# Altium PCB Wenzel_REF.PCBDOC (part 1 of 7)
Units mm, origin at the board's own origin, x right, y up, seen from the top; angles counter-clockwise.
Board outline 222.63 x 100.1 mm, 4 copper layers (Top, L2, L3, Bot), stack 1.6 mm thick; 406 components, 236 nets, 1324 pads, 1362 vias.
Unrouted connection lines stored in the file: 1.
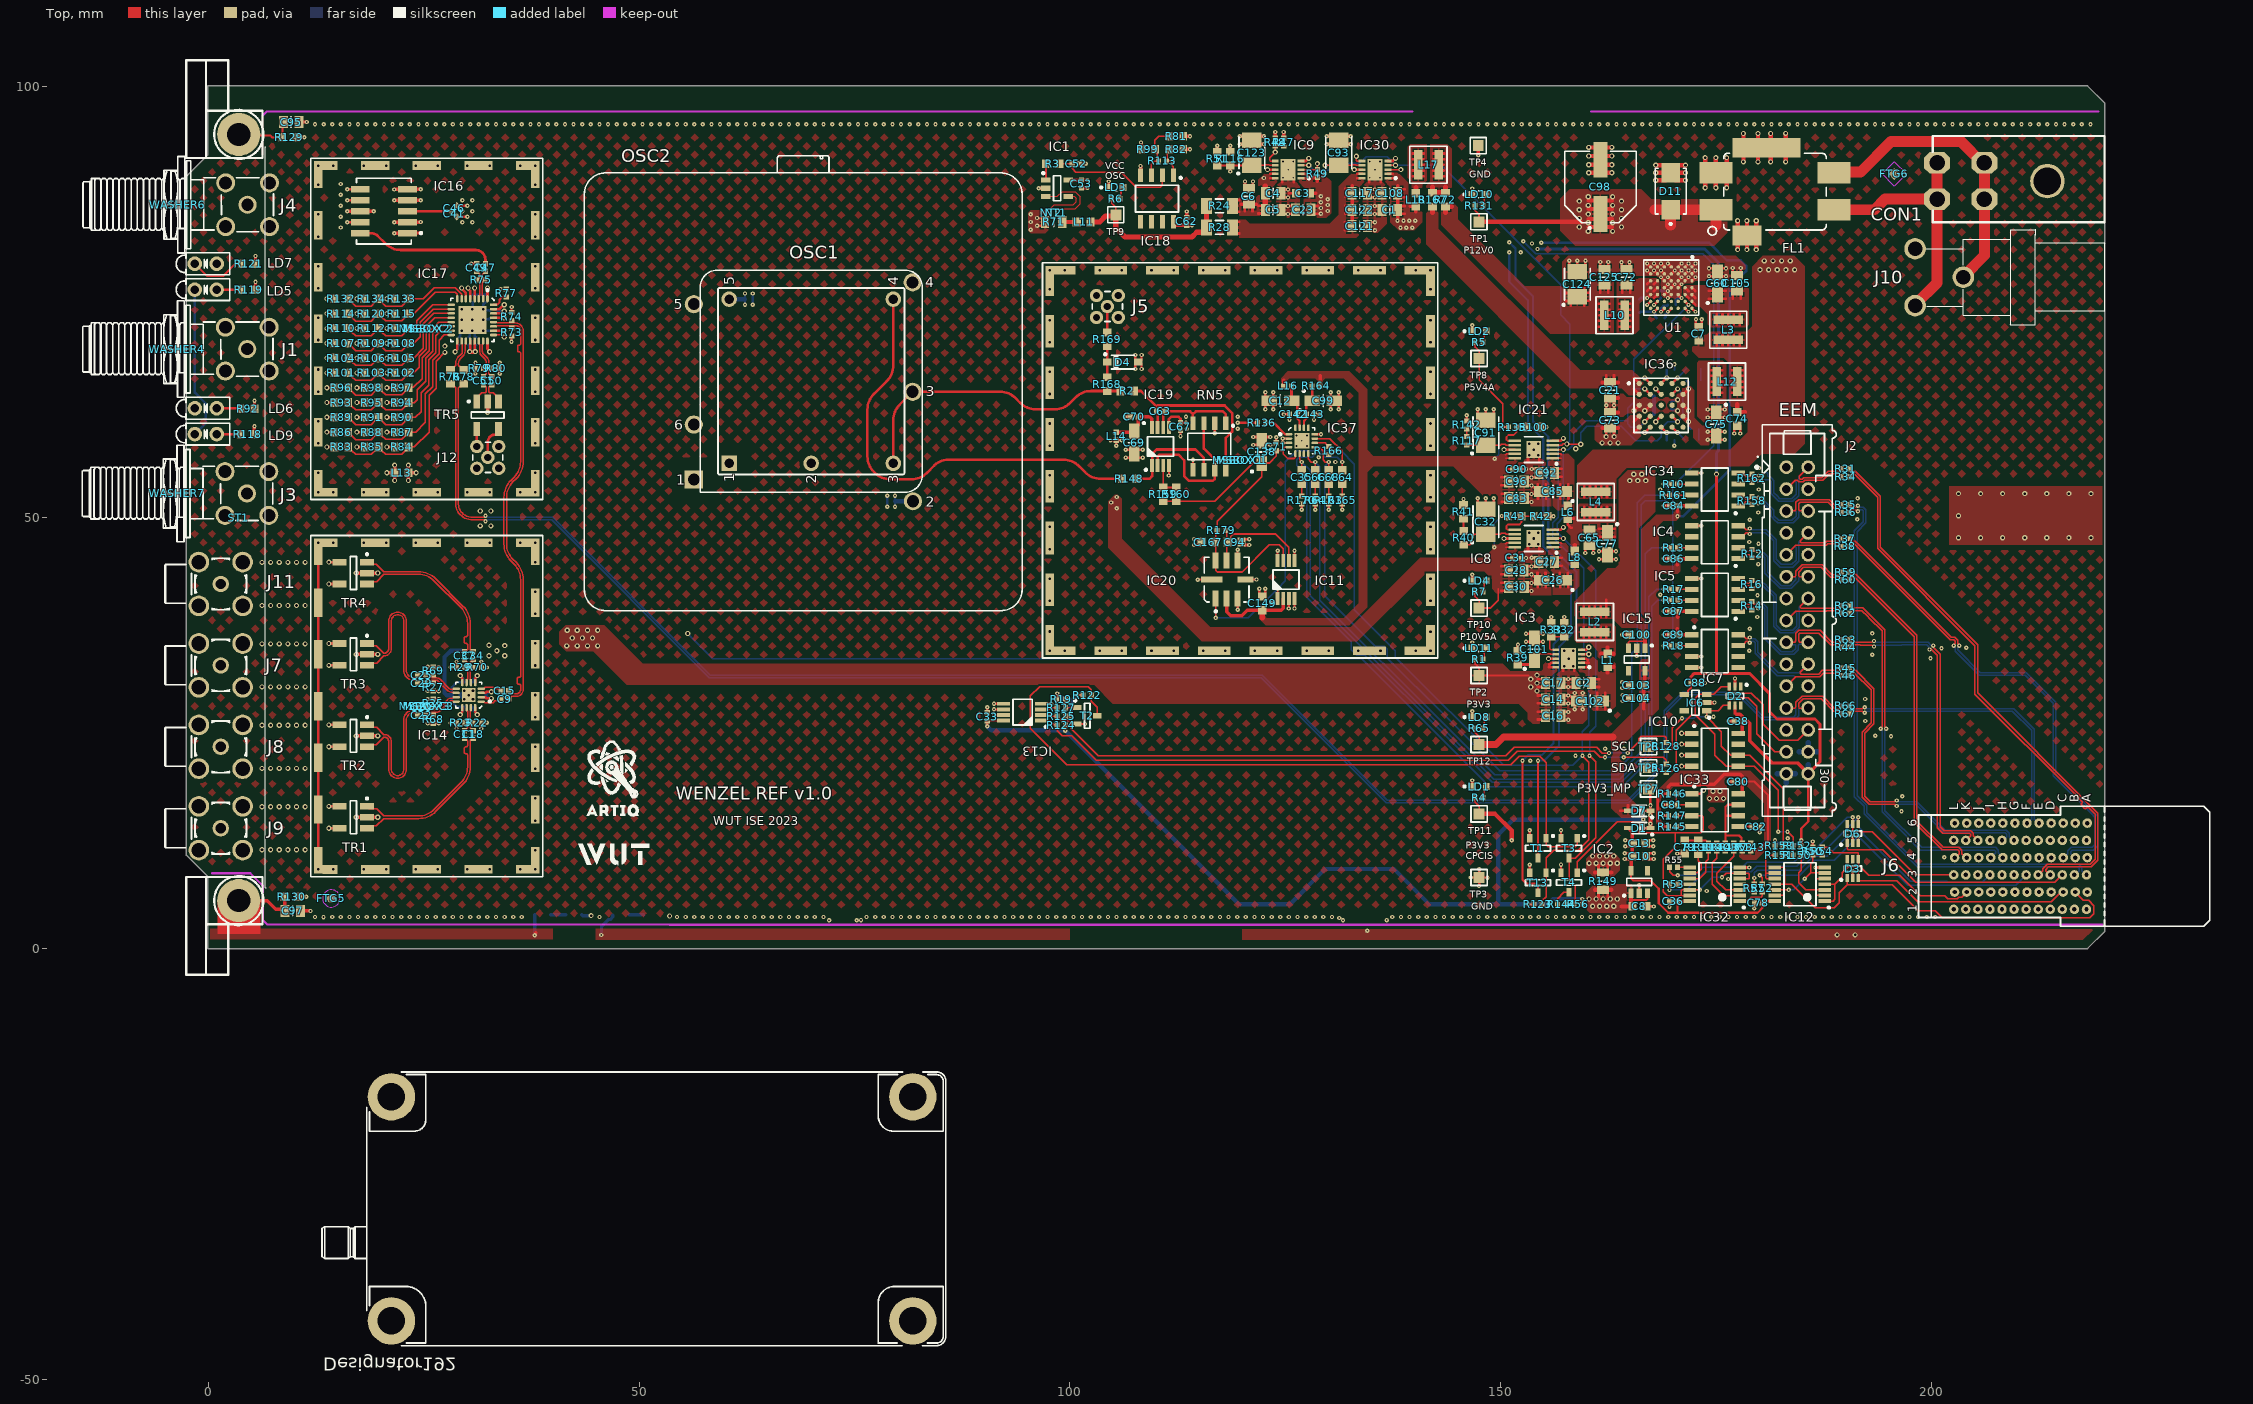
[diagram p0: Top view]
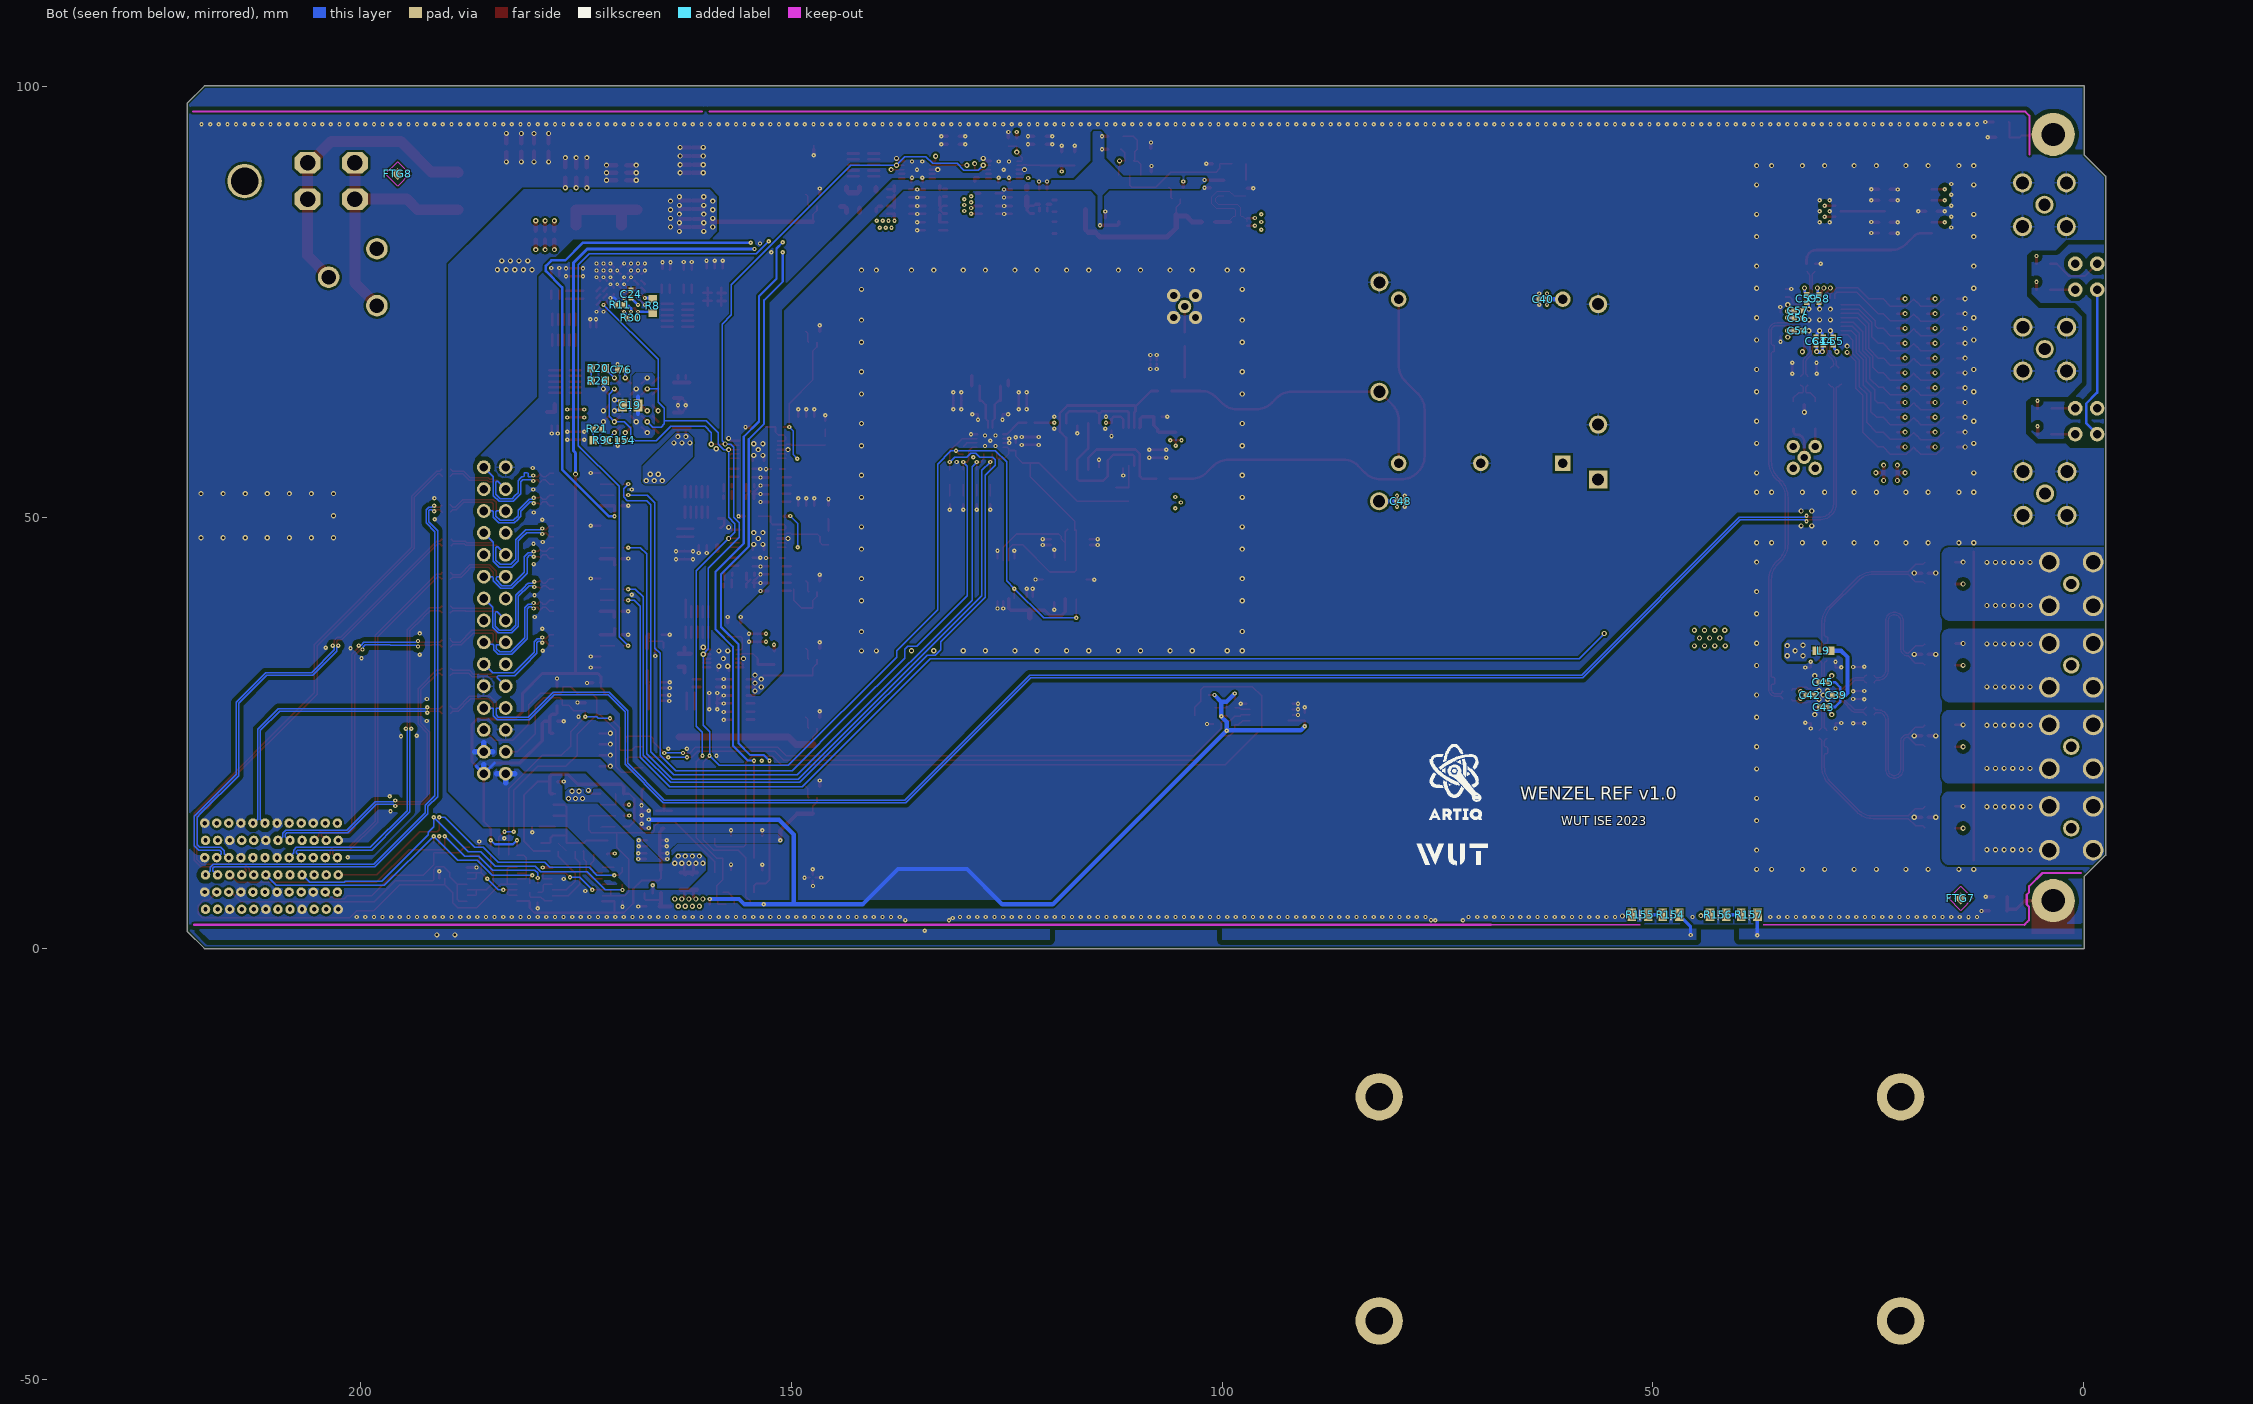
[diagram p1: Bot view, seen from below]
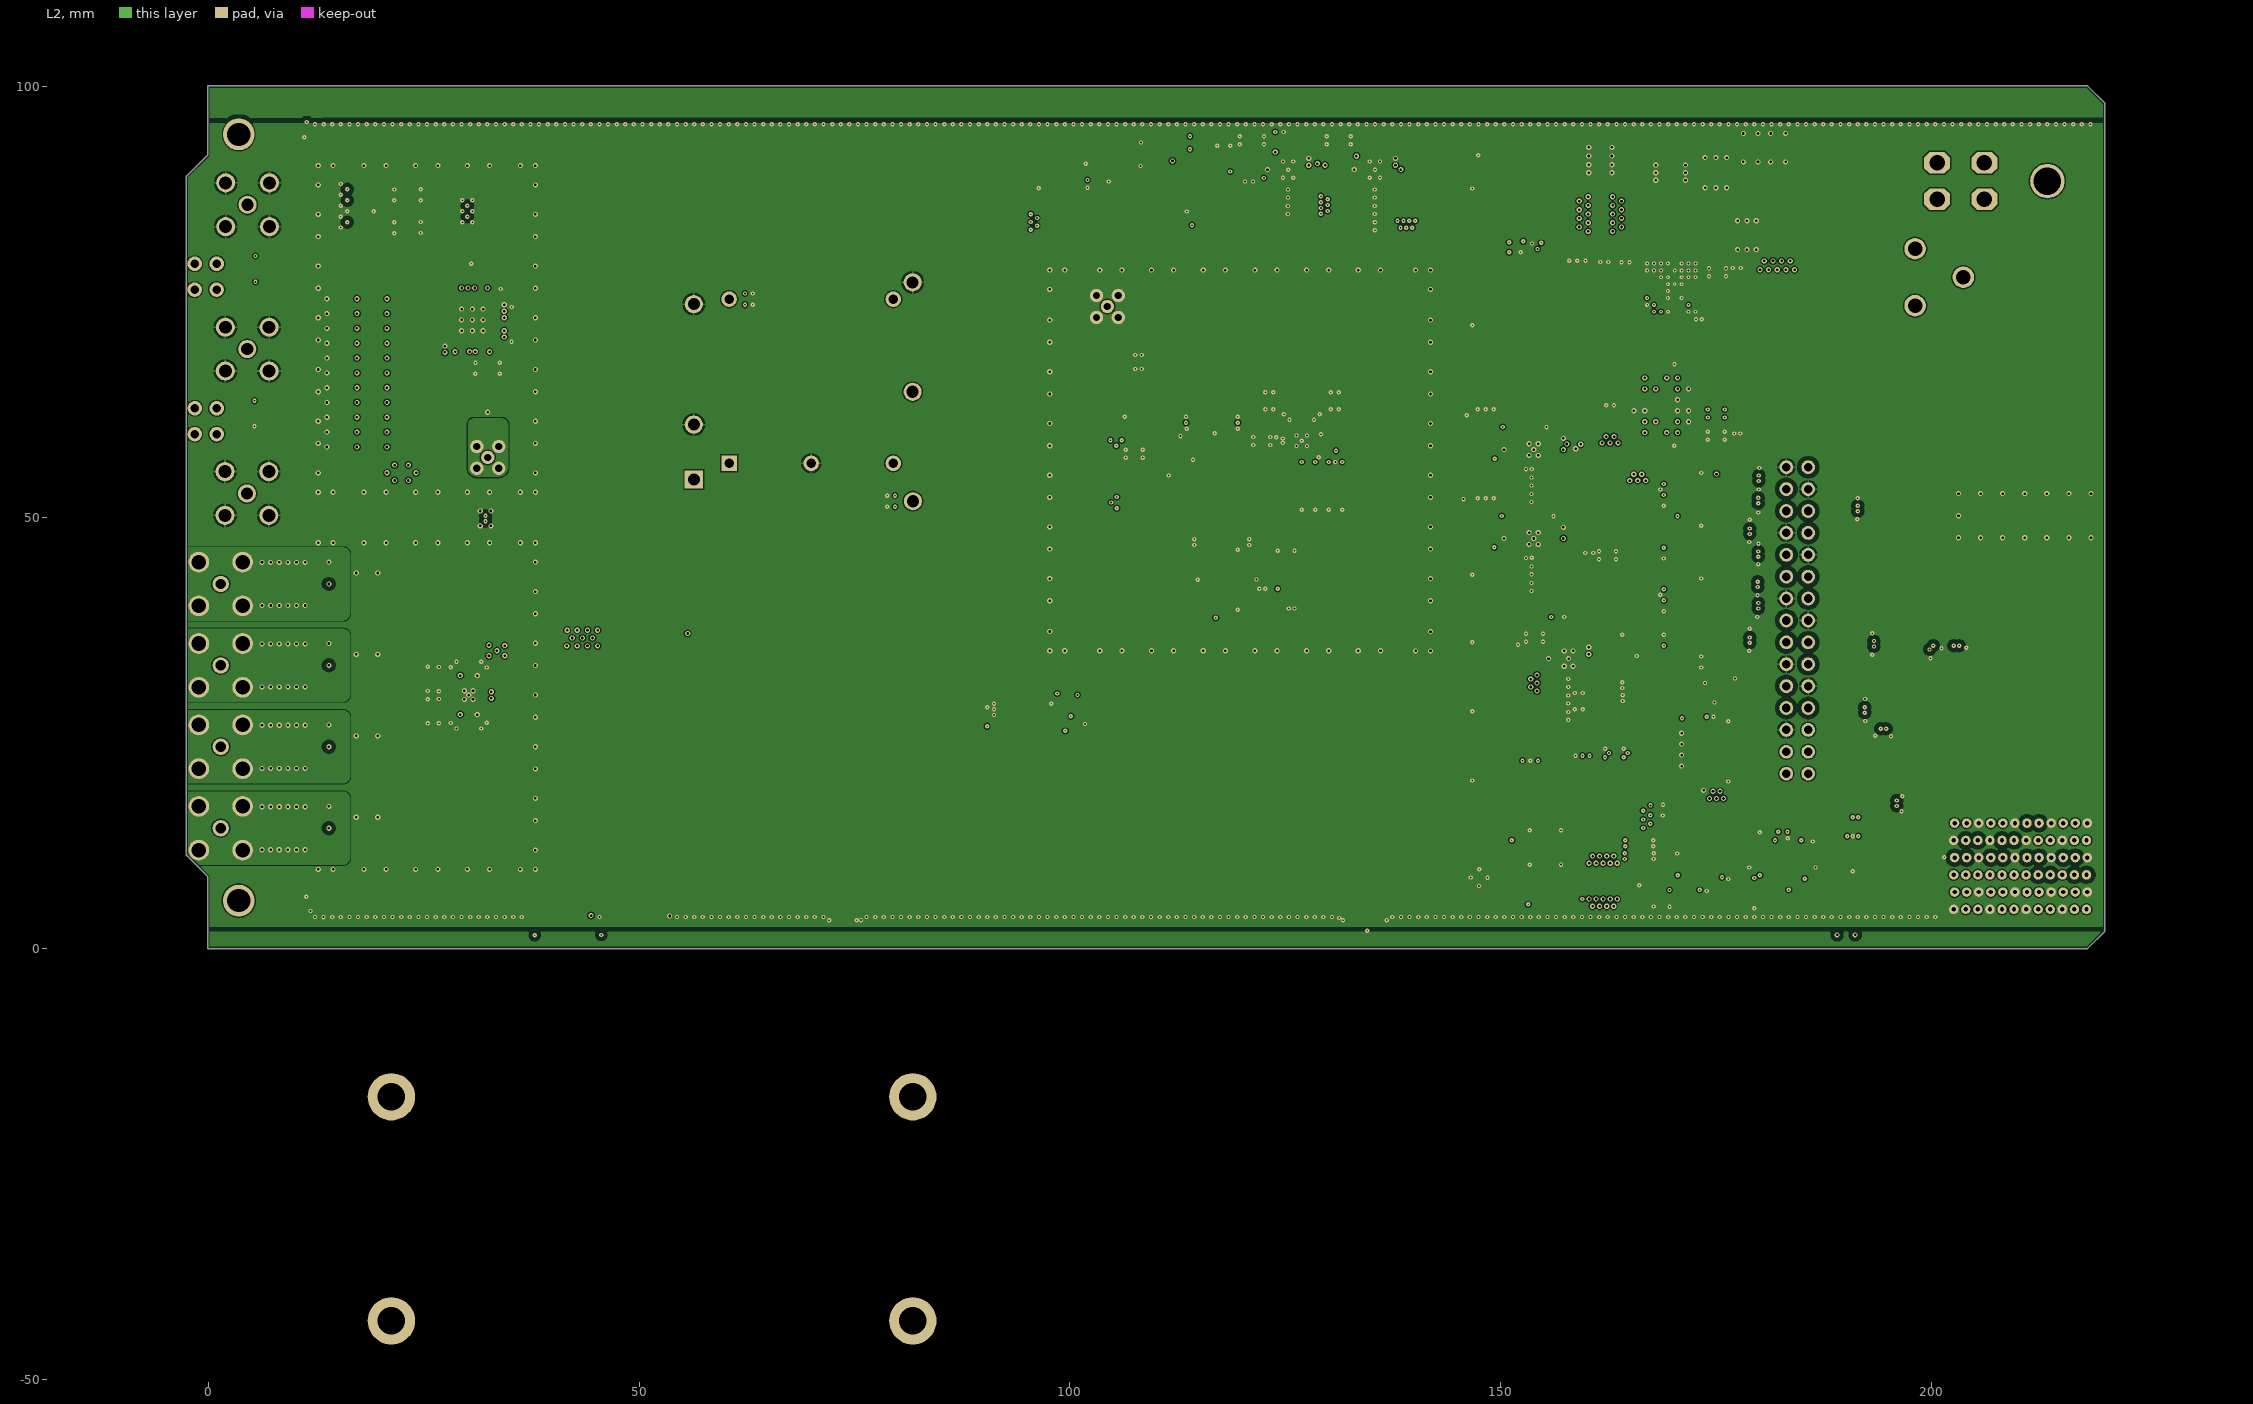
[diagram p2: L2]
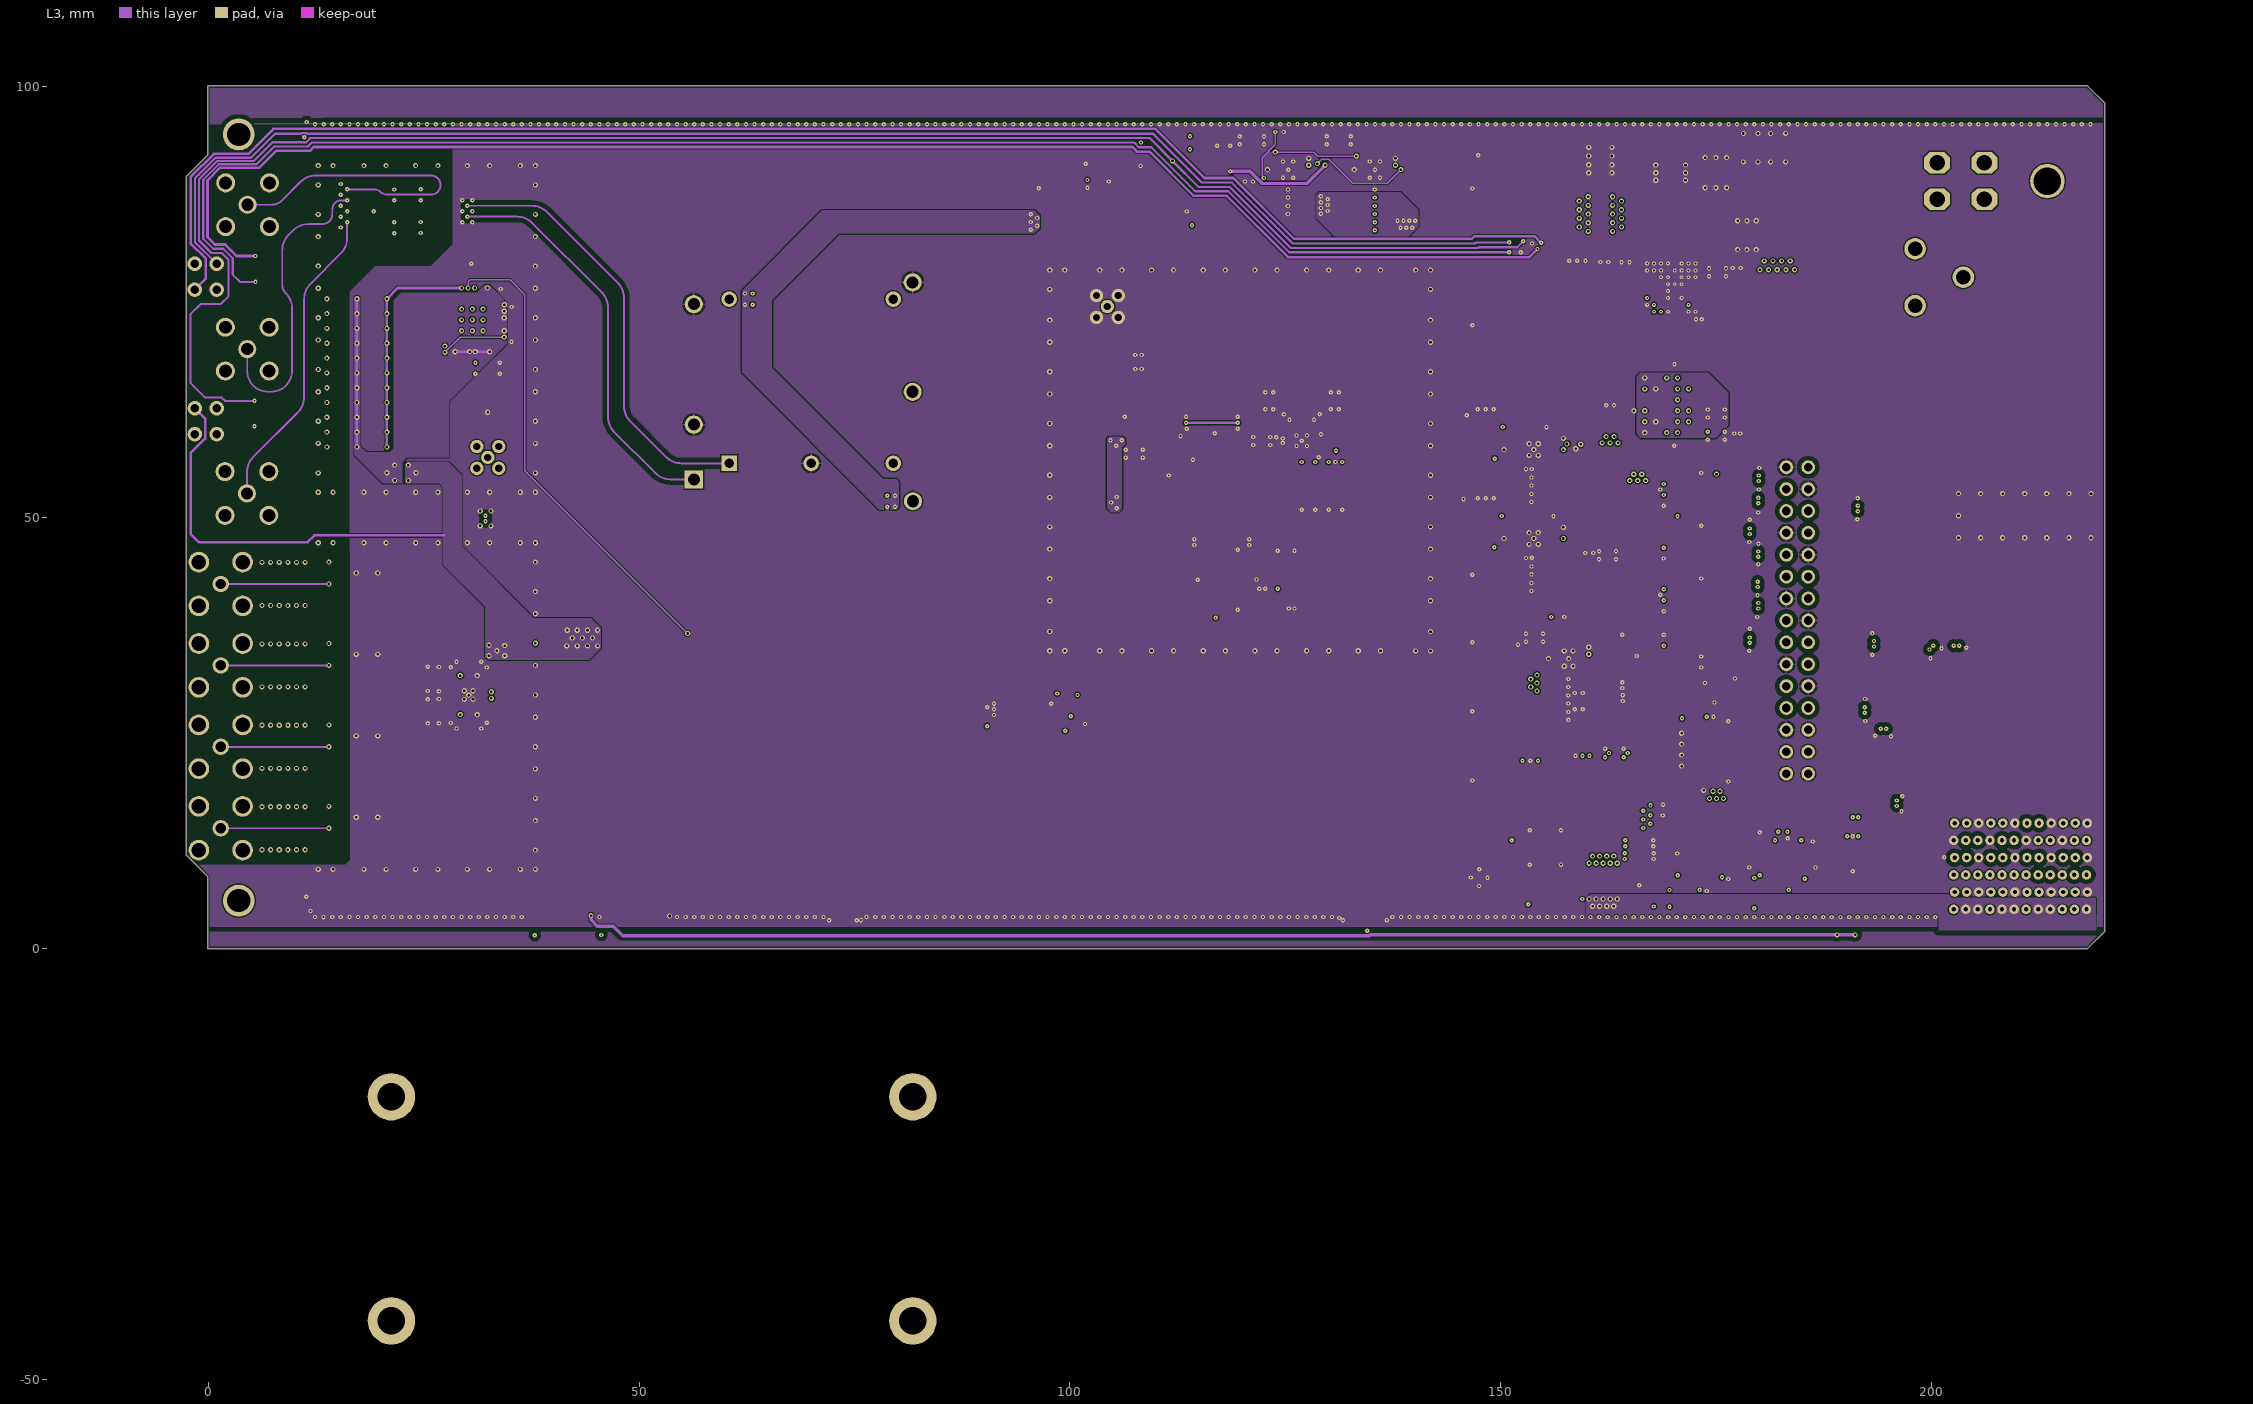
[diagram p3: L3]
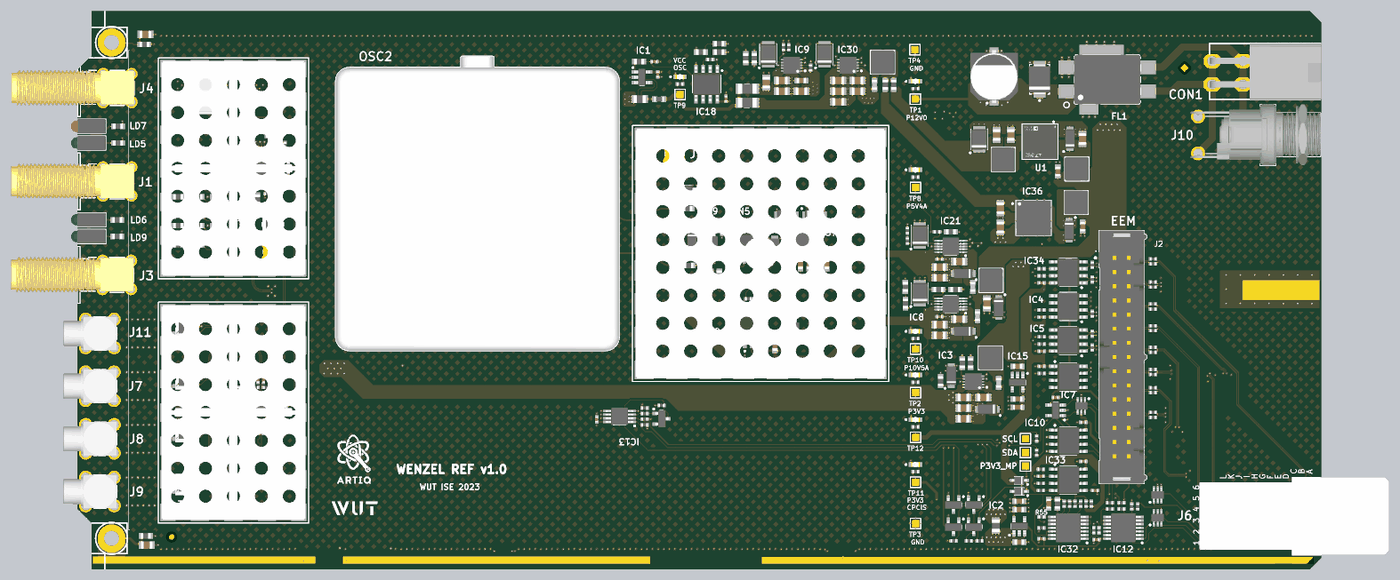
[diagram p8: 3D render of the assembled board from above, using the file's embedded part models]
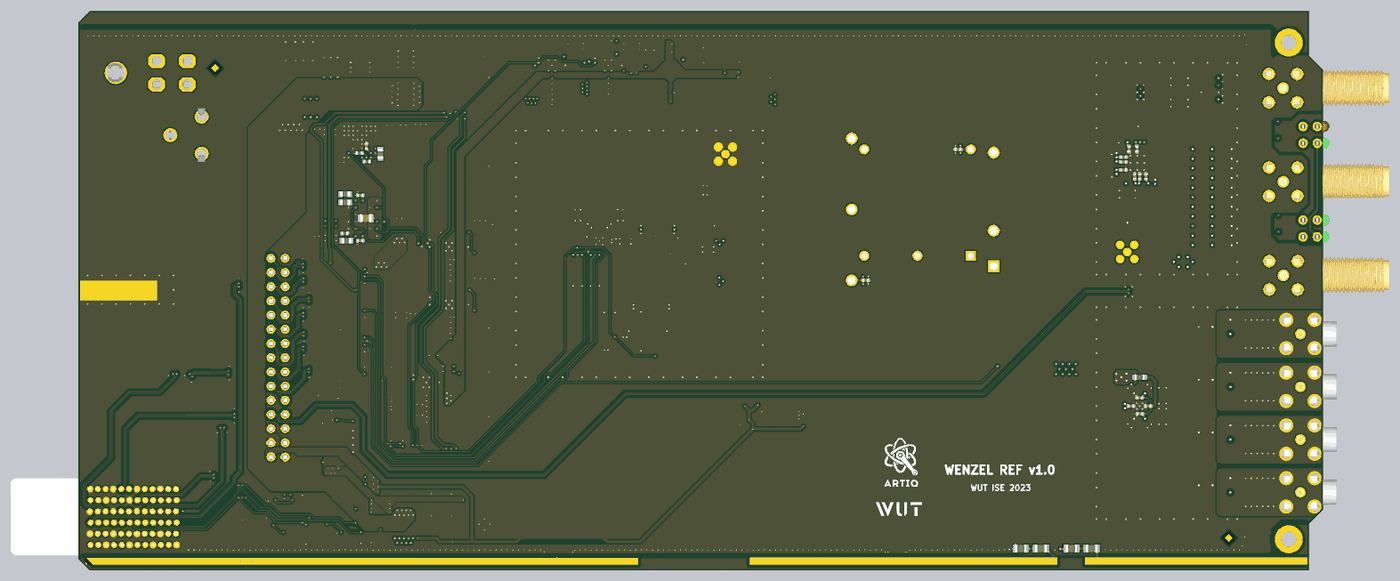
[diagram p9: 3D render of the assembled board from below, using the file's embedded part models]

## Layer stack, top to bottom
TopSolder: solder mask 0.0102, Solder Resist, Dk 3.5
Top: signal copper 0.035
Dielectric1: core 0.18, FR-4, Dk 4.2
L2: signal copper 0.035
Dielectric 3: prepreg 1.1, FR-4, Dk 4.2
L3: signal copper 0.035
Dielectric2: core 0.18, FR-4, Dk 4.2
Bot: signal copper 0.035
BottomSolder: solder mask 0.0102, Solder Resist, Dk 3.5

## Board outline
-2.54,10.82 -2.54,15.138 cw(c-2.489,15.138) -2.539,15.142 cw(c-2.489,15.145) -2.54,15.145 -2.54,22.645 -2.54,89.511 cw(c-2.489,89.511) -2.525,89.547 -0.05,92.021 -0.05,100 cw(c0,100) 0,100.05 159.99,100.05 cw(c159.995,100) 159.995,100.05 218.037,100.05 cw(c218.039,100) 218.075,100.036 220.074,98.036 cw(c220.039,98) 220.089,98 220.089,2 cw(c220.039,2) 220.074,1.964 218.075,-0.035 cw(c218.039,0) 218.039,-0.05 0,-0.05 cw(c0,0) -0.05,0 -0.05,8.299 -2.525,10.773 cw(c-2.489,10.809) -2.539,10.815 cw(c-2.489,10.82)

## Design rules (kind name [scope] priority, off if disabled: settings)
AcuteAngle [All] p1: minimum=6.00000000000000E+0001 checktracksonly=FALSE
BoardOutlineClearance [not (OnLayer('TopOverlay')  or  OnLayer('BottomOverlay') ) and not (HasFootprint('LED_DIALIGHT_555-200') or HasFootprint('DELOCK_65848') or HasFootprint('AMPHENOL_919-383J-51A'))] p1: gap=0.254 ignorepadtopadclearanceinfootprint=FALSE except(0: Arc-SplitContinuation Track-SplitContinuation SMDPad-SplitContinuation THPad-SplitContinuation Via-SplitContinuation Fill-SplitContinuation Poly-SplitContinuation Region-SplitContinuation Text-SplitContinuation)
Clearance Clearance_Balancing_To_Mechanicals [InPadClass('Mechanical') and (not PadIsPlated) vs InPolygonClass('PolyClass_Balancing')] p1: gap=0.7 ignorepadtopadclearanceinfootprint=FALSE // Clearance constraint used by the balancing polygon generator - between polygon and Mechanical pad class.
Clearance Clearance_Balancing_To_HV [InNetClass('HV') vs InPolygonClass('PolyClass_Balancing')] p2: gap=0.5 ignorepadtopadclearanceinfootprint=FALSE // Clearance constraint used by the balancing polygon generator - between polygon and HV Class.
Clearance Clearance_Balancing_To_DiffPair [InAnyDifferentialPair    or InNetClass('50_Ohms') vs InPolygonClass('PolyClass_Balancing')] p3: gap=1.5 ignorepadtopadclearanceinfootprint=FALSE // Clearance constraint used by the balancing polygon generator - between polygon and Diff pairs.
Clearance Clearance_Balancing_To_Keepout [OnLayer('KeepOutLayer') vs InPolygonClass('PolyClass_Balancing')] p4: gap=0.254 ignorepadtopadclearanceinfootprint=FALSE // Clearance constraint used by the balancing polygon generator - between polygon and Keepout layer.
Clearance Clearance_Balancing_To_Poly [InPolygon vs InPolygonClass('PolyClass_Balancing')] p5: gap=0.6 ignorepadtopadclearanceinfootprint=FALSE // Clearance constraint used by the balancing polygon generator - between polygon and polygons.
Clearance Clearance_Balancing_To_Rest [not OnLayer('KeepOutLayer') vs InPolygonClass('PolyClass_Balancing')] p6: gap=0.5 ignorepadtopadclearanceinfootprint=FALSE // Clearance constraint used by the balancing polygon generator - between polygon and everything else.
Clearance Clearance_HV [InNetClass('HV') vs not InNetClass('HV')] p7 off: gap=1 ignorepadtopadclearanceinfootprint=FALSE
Clearance Clearance_poly_PWR [InPolygon and WithinRoom('U_Supply') vs (OnTopLayer or OnBottomLayer or OnMultiLayer)] p8: gap=0.14 ignorepadtopadclearanceinfootprint=FALSE
Clearance Clearance_poly_Z [InAnyDifferentialPair    or InNetClass('50_Ohms') and (isArc or IsTrack or IsVia) vs InPolygon] p9: gap=0.5 ignorepadtopadclearanceinfootprint=FALSE
Clearance Clearance_poly_int [InPolygon   and not (OnTopLayer or OnBottomLayer) vs not (OnTopLayer or OnBottomLayer)] p10: gap=0.14 ignorepadtopadclearanceinfootprint=FALSE
Clearance Clearance_poly_ext [InPolygon  and (OnTopLayer or OnBottomLayer) vs (OnTopLayer or OnBottomLayer or OnMultiLayer)] p11: gap=0.25 ignorepadtopadclearanceinfootprint=FALSE
Clearance Clearance_DIFF [(InDifferentialPairClass('All Differential Pairs'))] p12: gap=0.127 ignorepadtopadclearanceinfootprint=FALSE except(0: Arc-Hole Track-Hole SMDPad-Hole THPad-Hole Via-Hole Fill-Hole Poly-Hole Region-Hole Text-Hole; 0.254: Arc-Poly THPad-Poly Fill-Poly Poly-Poly Poly-Region Poly-Text; 0.4: Track-Poly SMDPad-Poly Via-Poly)
Clearance [All] p13: gap=0.127 ignorepadtopadclearanceinfootprint=FALSE except(0: Arc-Hole Track-Hole SMDPad-Hole THPad-Hole Via-Hole Fill-Hole Poly-Hole Region-Hole Text-Hole; 0.35: THPad-Poly; 0.4: Arc-Poly SMDPad-Poly Via-Poly Fill-Poly Poly-Poly; 0.6: Track-Poly)
ComponentClearance [All] p1 off: gap=0.254 collisioncheckmode=3 verticalgap=0.254 showdistances=FALSE
DiffPairsRouting [All] p1: maxlimit=0.178 minlimit=0.127 mostfreqgap=0.152 toplayer_maxgap=0.127 toplayer_prefgap=0.127 toplayer_minwidth=0.172 toplayer_maxwidth=0.172 toplayer_prefwidth=0.172 bottomlayer_maxgap=0.127 bottomlayer_prefgap=0.127 bottomlayer_minwidth=0.172 bottomlayer_maxwidth=0.172 bottomlayer_prefwidth=0.172 impedanceprofiledriven=TRUE impedanceprofileid={53221982-2822-421F-BC51-AEF25F9C0D2D} impedanceprofilevalue=100.000000 maxuncoupledlength=12.7
FabricationTestPointUsage TestPointUsage [All] p1: valid=0 allowmultiple=FALSE
FabricationTestpoint Testpoint [All] p1: side=3 testpointundercomponent=TRUE minsize=1.016 maxsize=2.54 preferedsize=1.524 minholesize=0.508 maxholesize=1.016 preferedholesize=0.813 testpointgrid=0.025 allowsidetop=TRUE allowsidebottom=TRUE usegrid=TRUE gridtolerance=0
Height [All] p1 off: minheight=0 maxheight=25.4 prefheight=12.7
HoleSize [All] p1: absolutevalues=TRUE maxlimit=3.81 minlimit=0.2 maxpercent=80.000 minpercent=20.000
HoleToHoleClearance [All] p1: gap=0.25 allowstackedmicrovias=FALSE
MatchedLengths MatchedLengths_group_EEM_10MHz [InxSignalClass('xSignals_EEM_OUT_10MHz')] p1: tolerance=0.1 checknetsindiffpair=FALSE checkdiffpairvsdiffpair=TRUE checkxsignals=TRUE checkothers=TRUE
MatchedLengths MatchedLengths_group_EEM_100MHz [InxSignalClass('xSignals_EEM_OUT_100MHz')] p2: tolerance=0.1 checknetsindiffpair=FALSE checkdiffpairvsdiffpair=TRUE checkxsignals=TRUE checkothers=TRUE
MatchedLengths MatchedLengths_diffPairs_LVDS [InDifferentialPairClass('LVDS')] p3: tolerance=0.6 checknetsindiffpair=TRUE checkdiffpairvsdiffpair=FALSE checkxsignals=FALSE checkothers=FALSE
MatchedLengths MatchedLengths_diffPairs [InDifferentialPairClass('All Differential Pairs') and not InDifferentialPairClass('LVDS')] p4: tolerance=0.1 checknetsindiffpair=TRUE checkdiffpairvsdiffpair=FALSE checkxsignals=FALSE checkothers=FALSE
MinimumAnnularRing [All] p1: minimumring=0.1
MinimumSolderMaskSliver [All] p1: minsoldermaskwidth=0
PlaneClearance PlaneClearance_HV [InNetClass('HV')] p1: clearance=1
PlaneClearance [All] p2: clearance=0.254
PlaneConnect [All] p1: planeconnectstyle=Direct reliefexpansion=0.508 reliefentries=4 reliefconductorwidth=0.254 reliefairgap=0.254
PolygonConnect PolygonConnect_via [isVia] p1: thpad.connectstyle=Relief thpad.reliefconductorwidth=0.254 thpad.reliefentries=4 thpad.polygonreliefangle="90 Angle" thpad.airgapwidth=0.15 smdpad.connectstyle=Relief smdpad.reliefconductorwidth=0.254 smdpad.reliefentries=4 smdpad.polygonreliefangle="90 Angle" smdpad.airgapwidth=0.127 via.connectstyle=Direct via.reliefconductorwidth=0.254 via.reliefentries=4 via.polygonreliefangle="90 Angle" via.airgapwidth=0.254
PolygonConnect PolygonConnect_pressFit [HasFootprint('AMPHENOL_10052825-101LF')] p2: connectstyle=Direct reliefconductorwidth=0.254 reliefentries=4 polygonreliefangle="90 Angle" airgapwidth=0.15
PolygonConnect PolygonConnect_SMA [HasFootprint('SAMTEC_MMCX-J-P-H-ST-TH1')            or HasFootprint('AMPHENOL_919-383J-51A')] p3: connectstyle=Direct reliefconductorwidth=0.254 reliefentries=4 polygonreliefangle="90 Angle" airgapwidth=0.15
PolygonConnect PolygonConnect_PWR_BGA [WithinRoom('U_Supply') and (HasFootprint('FP-BGA-49-05-08-1518-MFG') or HasFootprint('BGA25C127P5X5_625X625X262'))] p4: connectstyle=Direct reliefconductorwidth=0.254 reliefentries=4 polygonreliefangle="90 Angle" airgapwidth=0.15
PolygonConnect PolygonConnect_PWR [WithinRoom('U_Supply')] p5: thpad.connectstyle=Relief thpad.reliefconductorwidth=0.254 thpad.reliefentries=4 thpad.polygonreliefangle="90 Angle" thpad.airgapwidth=0.15 smdpad.connectstyle=Relief smdpad.reliefconductorwidth=0.254 smdpad.reliefentries=4 smdpad.polygonreliefangle="90 Angle" smdpad.airgapwidth=0.15 via.connectstyle=Direct via.reliefconductorwidth=0.254 via.reliefentries=4 via.polygonreliefangle="90 Angle" via.airgapwidth=0.254
PolygonConnect PolygonConnect_pad [(InPadClass('All Pads') and not InComponent('J6'))] p6 off: thpad.connectstyle=Relief thpad.reliefconductorwidth=0.254 thpad.reliefentries=4 thpad.polygonreliefangle="90 Angle" thpad.airgapwidth=0.254 smdpad.connectstyle=Relief smdpad.reliefconductorwidth=0.254 smdpad.reliefentries=4 smdpad.polygonreliefangle="90 Angle" smdpad.airgapwidth=0.15 via.connectstyle=Relief via.reliefconductorwidth=0.254 via.reliefentries=4 via.polygonreliefangle="90 Angle" via.airgapwidth=0.254
PolygonConnect [All] p7: thpad.connectstyle=Relief thpad.reliefconductorwidth=0.254 thpad.reliefentries=4 thpad.polygonreliefangle="90 Angle" thpad.airgapwidth=0.254 smdpad.connectstyle=Relief smdpad.reliefconductorwidth=0.254 smdpad.reliefentries=4 smdpad.polygonreliefangle="90 Angle" smdpad.airgapwidth=0.15 via.connectstyle=Direct via.reliefconductorwidth=0.254 via.reliefentries=4 via.polygonreliefangle="45 Angle" via.airgapwidth=0.254
RoomDefinition Wenzel_REF [InComponentClass('Wenzel_REF')] p1: confinementstyle=ConfineIn formatcopy=TRUE lockcomponents=FALSE outline -11.25,-100.75 25.5,-100.75 25.5,-58.75 -11.25,-58.75
RoomDefinition U_Supply [InComponentClass('U_Supply')] p2: confinementstyle=ConfineIn formatcopy=TRUE lockcomponents=FALSE outline 180.182,95.6 143.4,95.6 143.4,4.265 180.182,4.265
RoomDefinition U_DIOT_Connectors [InComponentClass('U_DIOT_Connectors')] p3: confinementstyle=ConfineIn formatcopy=TRUE lockcomponents=FALSE outline 238.25,74.5 193.861,74.5 193.861,-0.5 238.25,-0.5
RoomDefinition U_DAC_Wenzel [InComponentClass('U_DAC_Wenzel')] p4: confinementstyle=ConfineIn formatcopy=TRUE lockcomponents=FALSE outline 95.9,79.5 127,79.5 127,38 95.9,38
RoomDefinition U_Clock_Generator_Divider [InComponentClass('U_Clock_Generator_Divider')] p5: confinementstyle=ConfineIn formatcopy=TRUE lockcomponents=FALSE outline 41.845,93 94.75,93 94.75,26.5 41.845,26.5
RoomDefinition U_Clock_fanout [InComponentClass('U_Clock_fanout')] p6: confinementstyle=ConfineIn formatcopy=TRUE lockcomponents=FALSE outline 9.534,46.009 9.534,24.826 18.095,24.826 18.095,46.009
RoomDefinition Overlapping [InComponentClass('Overlapping')] p7: confinementstyle=ConfineIn formatcopy=TRUE lockcomponents=FALSE outline -55,-49.75 -14.5,-49.75 -14.5,-32.75 -55,-32.75
RoomDefinition EEM_connector [InComponentClass('EEM_connector')] p8: confinementstyle=ConfineIn formatcopy=TRUE lockcomponents=FALSE outline 194.855,74.542 164.749,74.542 164.749,0.964 194.855,0.964
RoutingVias "Schematic Routing Via Style_1" [InNet('GNDF')] p1: holewidth=0.5 width=0.7 viastyle="Through Hole" minholewidth=0.5 minwidth=0.7 maxholewidth=0.711 maxwidth=1.27
RoutingVias "Schematic Routing Via Style" [InNet('P12V0F')] p2: holewidth=0.5 width=0.7 viastyle="Through Hole" minholewidth=0.5 minwidth=0.7 maxholewidth=0.711 maxwidth=1.27
RoutingVias [All] p3: holewidth=0.2 width=0.5 viastyle="Through Hole" minholewidth=0.2 minwidth=0.45 maxholewidth=0.711 maxwidth=1.27
SilkToSilkClearance [All] p1: silktosilkclearance=0
SilkToSolderMaskClearance SilkscreenOverComponentPads [IsPad] p1: minsilkscreentomaskgap=0 clearancetoexposedcopper=TRUE
SolderMaskExpansion SolderMaskExpansion_via [IsVia] p1: expansion=0.102 istentingtop=TRUE
SolderMaskExpansion [All] p2: expansion=0.051 istentingtop=FALSE
SupplyNets "Schematic Supply Nets_15" [InNet('GND')] p1: voltage=0.000
SupplyNets "Schematic Supply Nets_14" [InNet('P12V0_CPCIS')] p2: voltage=0.000
SupplyNets "Schematic Supply Nets_13" [InNet('P12V0')] p3: voltage=0.000
SupplyNets "Schematic Supply Nets_12" [InNet('P5V4A')] p4: voltage=0.000
SupplyNets "Schematic Supply Nets_11" [InNet('P3V3_CPCIS')] p5: voltage=0.000
SupplyNets "Schematic Supply Nets_10" [InNet('P3V3')] p6: voltage=0.000
SupplyNets "Schematic Supply Nets_9" [InNet('P12V0F')] p7: voltage=0.000
SupplyNets "Schematic Supply Nets_8" [InNet('CHASSIS')] p8: voltage=0.000
SupplyNets "Schematic Supply Nets_7" [InNet('P3V6')] p9: voltage=0.000
SupplyNets "Schematic Supply Nets_6" [InNet('P3V3A')] p10: voltage=0.000
SupplyNets "Schematic Supply Nets_5" [InNet('P5V5')] p11: voltage=0.000
SupplyNets "Schematic Supply Nets_4" [InNet('VCC_OSC')] p12: voltage=0.000
SupplyNets "Schematic Supply Nets_3" [InNet('P13V0')] p13: voltage=0.000
SupplyNets "Schematic Supply Nets_2" [InNet('P10V5A')] p14: voltage=0.000
SupplyNets "Schematic Supply Nets_1" [InNet('P3V3_MP')] p15: voltage=0.000
SupplyNets "Schematic Supply Nets" [InNet('GNDF')] p16: voltage=0.000
UnRoutedNet [not InNet('STRIP1')] p1:
Width "Schematic Width Constraint_1" [InNet('GNDF')] p1: maxlimit=1.27 minlimit=0.381 preferedwidth=0.508
Width "Schematic Width Constraint" [InNet('P12V0F')] p2: maxlimit=1.27 minlimit=0.381 preferedwidth=0.508
Width Z50R [InNetClass('50_Ohms')] p3: maxlimit=0.3 minlimit=0.225 preferedwidth=0.3 toplayer_minwidth=0.3 midlayer1_maxwidth=0.226 midlayer1_prefwidth=0.226 bottomlayer_minwidth=0.3 impedanceprofiledriven=TRUE impedanceprofileid={EFEE2A6A-61C3-48C3-95D8-2A8A95BD24BA} impedanceprofilevalue=50.000000 minimp=50.000000 maximp=50.000000 favimp=50.000000
Width [All] p4: maxlimit=1.27 minlimit=0.127 preferedwidth=0.127
17 further rules are at their usual default settings.

## Classes and differential pairs
polygon class PolyClass_Balancing: Balancing_Bot Balancing_L2 Balancing_L3 Balancing_Top
differential pair class LVDS: BP_IO.LVDS0 BP_IO.LVDS1 BP_IO.LVDS2 BP_IO.LVDS3 BP_IO.LVDS4 BP_IO.LVDS5 BP_IO.LVDS6 BP_IO.LVDS7 LVDS0 LVDS1 LVDS2 LVDS3 LVDS4 LVDS5 LVDS6 LVDS7 PE_CLK.CLK
component class Overlapping: J6
net class "xtalk digital": LDACn NetC35_2 NetC64_2 NetC66_2 NetC68_2 NetIC37_10 PGOOD SPI_MOSI SPI_NSS SPI_SCK
net class "xtalk analogue": NetC71_2 NetIC37_1
net class Power: NetC40_2 NetL11_2
net class 50_Ohms: NetC41_1 NetC41_2 NetC46_1 NetC47_1 RF_100M_OUT0 RF_100M_OUT1 RF_100M_OUT2 RF_DIV5_OUT RF_DIV_OUT0 RF_DIV_OUT1 RF_DIV_OUT2 RF_DIV_OUT3
component class U_DAC_Wenzel: C12 C35 C67 C70 C71 C94 C99 C138 C142 C143 C149 C167 IC11 IC19 IC20 IC37 L14 L16 R2 R64 R136 R148 R159 R160 R163 R164 R165 R166 R170 R179 RN5
component class U_Clock_Generator_Divider: C41 C54 C57 IC1 IC17 IC18 LD6 NT1 NT2 OSC1 OSC2 R3 R71 R73 R74 R75 R76 R77 R78 R79 R80 R81 R82 R83 R84 R85 R86 R87 R88 R89 R90 R91 R92 R93 R94 R95 R96 R97 R98 R99 R101 R102 R103 R104 R105 R106 R107 R108 R109 R110 R111 R112 R113 R114 R115 R120 R132 R133 R134 TR5
component class U_Clock_fanout: C9 C11 C15 C20 C22 C25 C37 C43 L9 R68 R69 R70 TR1 TR2 TR3 TR4
net class ESD_STRIP: CHASSIS STRIP1 STRIP2
net class BP_IO.LVDS_P[0..7]: BP_IO.LVDS_P0 BP_IO.LVDS_P1 BP_IO.LVDS_P2 BP_IO.LVDS_P3 BP_IO.LVDS_P4 BP_IO.LVDS_P5 BP_IO.LVDS_P6 BP_IO.LVDS_P7
net class BP_IO.LVDS_N[0..7]: BP_IO.LVDS_N0 BP_IO.LVDS_N1 BP_IO.LVDS_N2 BP_IO.LVDS_N3 BP_IO.LVDS_N4 BP_IO.LVDS_N5 BP_IO.LVDS_N6 BP_IO.LVDS_N7
component class U_DIOT_Connectors: C78 C79 C80 D3 IC12 J6 R50 R55 R58 R137 R138 R139 R140 R141 R144 R145 R146 R147 T4
net class Hpower: GNDF NetC2_2 NetC19_2 NetC72_2 NetC85_1 P3V3A P3V6 P5V4A P5V5 P5V5A P12V0F P13V0 VCC_OSC1 VCC_OSC2
component class U_Supply: C1 C2 C3 C4 C5 C6 C7 C8 C10 C13 C14 C16 C17 C21 C23 C24 C31 C72 C73 C74 C75 C76 C85 C90 C91 C92 C93 C96 C98 C100 C101 C102 C103 C104 C105 C108 C124 C125 C154 CON1 D1 D7 D11 FL1 IC2 IC9 IC21 IC30 IC36 J10 L2 L8 L17 L18 LD1 LD2 LD3 LD4 LD8 LD10 LD11 R1 R4 R5 R6 R9 R11 R30 R33 R39 R40 R41 R42 R43 R47 R49 R65 R72 R100 R116 R117 R131 R135 R167 TP1 TP2 TP3 TP4 U1
component class EEM_connector: C38 C84 C86 C87 C88 C89 IC5 IC6 IC10 J2 R10 R12 R13 R14 R15 R16 R17 R31 R34 R35 R36 R37 R44 R45 R46 R59 R60 R61 R62 R63 R66 R67 R149 R150 R151 R152 R153 R158 R161 R162 TP5 TP6
component class Wenzel_REF: C33 C95 C97 FTG5 FTG6 FTG7 FTG8 J1 J3 J4 J5 J7 J8 J9 J11 J12 LD5 LD7 LD9 MSBOX1 MSBOX2 MSBOX3 MSBOXC1 MSBOXC2 MSBOXC3 R118 R119 R121 R122 R123 R124 R125 R126 R127 R128 R129 R130 R154 R155 R156 R157 R168 R169 ST1 T1 T2 T3 T13 WASHER4 WASHER6 WASHER7
differential pair RF_DIV2_OUTR: +RF_DIV2_OUTR_P -RF_DIV2_OUTR_N
differential pair RF_DIV1_OUT: +RF_DIV1_OUT_P -RF_DIV1_OUT_N
differential pair RF_DIV1_OUTC: +RF_DIV1_OUTC_P -RF_DIV1_OUTC_N
differential pair RF_CLK: +RF_CLK_P -RF_CLK_N
differential pair IN_CLK0C: +IN_CLK0C_P -IN_CLK0C_N
differential pair EEM_OUT3C: +EEM_OUT3C_P -EEM_OUT3C_N
differential pair EEM_OUT2C: +EEM_OUT2C_P -EEM_OUT2C_N
differential pair EEM_OUT1C: +EEM_OUT1C_P -EEM_OUT1C_N
differential pair EEM_OUT0C: +EEM_OUT0C_P -EEM_OUT0C_N
differential pair IN_CLK0: +IN_CLK0_P -IN_CLK0_N
differential pair EEM_OUT3: +EEM_OUT3_P -EEM_OUT3_N
differential pair EEM_OUT2: +EEM_OUT2_P -EEM_OUT2_N
differential pair EEM_OUT1: +EEM_OUT1_P -EEM_OUT1_N
differential pair EEM_OUT0: +EEM_OUT0_P -EEM_OUT0_N
differential pair BP_IO.LVDS4: +BP_IO.LVDS_P4 -BP_IO.LVDS_N4
differential pair BP_IO.LVDS3: +BP_IO.LVDS_P3 -BP_IO.LVDS_N3
differential pair BP_IO.LVDS2: +BP_IO.LVDS_P2 -BP_IO.LVDS_N2
differential pair BP_IO.LVDS1: +BP_IO.LVDS_P1 -BP_IO.LVDS_N1
differential pair BP_IO.LVDS0: +BP_IO.LVDS_P0 -BP_IO.LVDS_N0
differential pair PE_CLK.CLK: +PE_CLK.CLK_P -PE_CLK.CLK_N
differential pair BP_IO.LVDS7: +BP_IO.LVDS_P7 -BP_IO.LVDS_N7
differential pair BP_IO.LVDS6: +BP_IO.LVDS_P6 -BP_IO.LVDS_N6
differential pair BP_IO.LVDS5: +BP_IO.LVDS_P5 -BP_IO.LVDS_N5
differential pair LVDS7: +LVDS7_P -LVDS7_N
differential pair LVDS6: +LVDS6_P -LVDS6_N
differential pair LVDS5: +LVDS5_P -LVDS5_N
differential pair LVDS4: +LVDS4_P -LVDS4_N
differential pair LVDS3: +LVDS3_P -LVDS3_N
differential pair LVDS2: +LVDS2_P -LVDS2_N
differential pair LVDS1: +LVDS1_P -LVDS1_N
differential pair LVDS0: +LVDS0_P -LVDS0_N

## Components (designator, comment, footprint, x,y, rotation, side; value= is the part's Value field where it differs from the comment)
C1 "22uF" CAPC2012X135N 137.105,85.662 r0 top
C2 "22uF" CAPC2012X135N 159.61,30.778 r0 top
C3 "2.2uF" CAPC1608X87N 127.035,87.593 r0 top
C4 "22uF" CAPC2012X135N 123.564,87.581 r180 top
C5 "22uF" CAPC2012X135N 123.564,85.665 r180 top
C6 "22uF" CAPC2012X135N 120.75,87.215 r270 top
C7 "1uF" CAPC1608X87N 172.966,71.282 r270 top
C8 "1uF" CAPC1608X87N 166.052,4.836 r180 top
C9 "100nF" CAPC1005X55N 34.429,28.896 r180 top
C10 "1uF" CAPC1608X87N 166.046,10.676 r180 top
C11 "100nF" CAPC1005X55N 29.753,24.789 r90 top
C12 "10uF" CAPMP3216X180N 124.405,63.519 r180 top
C13 "22uF" CAPC1608X90N 166.046,12.176 r180 top
C14 "22uF" CAPC2012X135N 156.064,28.869 r180 top
C15 "100nF" CAPC1005X55N 34.429,29.842 r180 top
C16 "22uF" CAPC2012X135N 156.064,26.962 r180 top
C17 "22uF" CAPC2012X135N 156.064,30.778 r180 top
C18 "100nF" CAPC1005X55N 30.753,24.789 r90 top
C19 "22uF" CAPC2012X135N 168.668,62.983 r180 bottom
C20 "100nF" CAPC1005X55N 24.769,27.956 r0 top
C21 "22uF" CAPC2012X135N 162.679,64.718 r90 top
C22 "100nF" CAPC1005X55N 24.769,27.026 r0 top
C23 "22uF" CAPC2012X135N 127.045,85.667 r0 top
C24 "100nF" CAPC1005X55N 168.566,75.882 r270 bottom
C25 "100nF" CAPC1005X55N 24.769,31.686 r0 top
C26 "10uF" CAPMP3216X180N 156.039,42.671 r180 top
C27 "22uF" CAPC2012X135N 155.291,44.815 r0 top
C28 "22uF" CAPC2012X135N 151.801,43.815 r180 top
C29 "100nF" CAPC1005X55N 24.769,30.756 r0 top
C30 "22uF" CAPC2012X135N 151.806,41.918 r180 top
C31 "100nF" CAPC1005X55N 151.804,45.265 r180 top
C32 "22uF" CAPMP3528X210N 148.25,49.477 r90 top
C33 "100nF" CAPC1005X55N 90.4,26.849 r270 top
C34 "100nF" CAPC1005X55N 30.753,33.923 r270 top
C35 "15pF" CAPC1608X87N 126.897,54.646 r270 top
C36 "100nF" CAPC1005X55N 170.024,5.445 r0 top
C37 "100nF" CAPC1005X55N 29.753,33.923 r270 top
C38 "100nF" CAPC1005X55N 177.526,26.323 r0 top
C39 "100nF" CAPC1005X55N 28.723,29.356 r180 bottom
C40 "100nF" CAPC1005X55N 62.75,75.3 r180 bottom
C41 "100nF" CAPC1005X55N 28.53,85.182 r135 top
C42 "100nF" CAPC1005X55N 31.759,29.356 r0 bottom
C43 "10nF" CAPC1005X55N 30.201,27.971 r180 bottom
C44 "10nF" CAPC1005X55N 30.229,70.431 r270 bottom
C45 "10nF" CAPC1005X55N 30.236,30.856 r180 bottom
C46 "100nF" CAPC1005X55N 28.53,85.818 r225 top
C47 "10nF" CAPC1005X55N 32.18,78.957 r270 top
C48 "100nF" CAPC1005X55N 79.25,51.85 r0 bottom
C49 "10nF" CAPC1005X55N 31.18,78.957 r270 top
C50 "100nF" CAPC1005X55N 32.897,65.828 r90 top
C51 "100nF" CAPC1005X55N 31.957,65.828 r90 top
C52 "100nF" CAPC1005X55N 100.699,90.99 r180 top
C53 "100nF" CAPC1005X55N 101.334,88.672 r90 top
C54 "10nF" CAPC1005X55N 33.142,71.64 r0 bottom
C55 "10nF" CAPC1005X55N 29.09,70.431 r270 bottom
C56 "100nF" CAPC1005X55N 33.142,73.074 r0 bottom
C57 "10nF" CAPC1005X55N 33.142,73.933 r0 bottom
C58 "10nF" CAPC1005X55N 30.724,75.362 r90 bottom
C59 "10nF" CAPC1005X55N 32.15,75.362 r90 bottom
C60 "10uF" CAPMP3216X180N 175.12,77.132 r90 top
C61 "100nF" CAPC1005X55N 31.077,70.431 r270 bottom
C62 "100nF" CAPC1005X55N 113.55,84.317 r270 top
C63 "10pF" CAPC1005X55N 110.491,62.289 r180 top
C64 "15pF" CAPC1608X87N 131.575,54.646 r270 top
C65 "22uF" CAPC2012X135N 160.259,47.627 r90 top
C66 "15pF" CAPC1608X87N 128.456,54.646 r270 top
C67 "47pF" CAPC1005X55N 112.818,60.51 r270 top
C68 "15pF" CAPC1608X87N 130.015,54.646 r270 top
C69 "10uF" CAPMP3216X180N 107.449,58.645 r270 top
C70 "100nF" CAPC1005X55N 107.449,61.645 r0 top
C71 "100nF" CAPC1005X55N 123.936,58.174 r270 top
C72 "22uF" CAPC2012X135N 164.557,77.832 r270 top
C73 "22uF" CAPC2012X135N 162.679,61.248 r270 top
C74 "1uF" CAPC1608X87N 177.42,61.403 r90 top
C75 "10uF" CAPMP3216X180N 174.972,60.768 r270 top
C76 "100nF" CAPC1005X55N 169.682,67.093 r180 bottom
C77 "10uF" CAPMP3216X180N 162.361,46.918 r270 top
C78 "100nF" CAPC1005X55N 179.869,5.283 r0 top
C79 "22uF" CAPC1608X90N 171.331,11.723 r90 top
C80 "100nF" CAPC1005X55N 177.526,19.314 r0 top
C81 "1uF" CAPC1005X55N 169.906,16.635 r0 top
C82 "100nF" CAPC1005X55N 179.615,14.095 r180 top
C83 "22uF" CAPC2012X135N 151.808,52.219 r180 top
C84 "100nF" CAPC1005X55N 170.039,51.306 r0 top
C85 "10uF" CAPMP3216X180N 156.039,52.994 r180 top
C86 "100nF" CAPC1005X55N 170.039,45.188 r0 top
C87 "100nF" CAPC1005X55N 170.049,39.075 r0 top
C88 "100nF" CAPC1005X55N 172.532,30.764 r180 top
C89 "100nF" CAPC1005X55N 170.049,36.366 r0 top
C90 "100nF" CAPC1005X55N 151.808,55.578 r180 top
C91 "22uF" CAPMP3528X210N 148.25,59.797 r90 top
C92 "22uF" CAPC2012X135N 155.301,55.135 r0 top
C93 "22uF" CAPMP3528X210N 131.179,92.277 r90 top
C94 "1uF" CAPC1608X87N 119.103,47.115 r180 top
C95 "Undefined" CAPC2012X135N 9.625,95.85 r0 top
C96 "22uF" CAPC2012X135N 151.808,54.144 r180 top
C97 "Undefined" CAPC2012X135N 9.825,4.314 r0 top
C98 "220uF" CAPAE830X620N 161.54,88.321 r90 top
C99 "10uF" CAPMP3216X180N 129.388,63.519 r0 top
C100 "1uF" CAPC1608X87N 165.755,36.355 r0 top
C101 "22uF" CAPMP3216X180N 153.886,34.677 r90 top
C102 "22uF" CAPMP3216X180N 160.354,28.667 r180 top
C103 "1uF" CAPC1608X87N 165.76,30.516 r0 top
C104 "22uF" CAPC1608X90N 165.76,29.016 r0 top
C105 "22uF" CAPC2012X135N 177.37,77.132 r270 top
C108 "22uF" CAPC2012X135N 137.105,87.581 r0 top
C117 "22uF" CAPC2012X135N 133.635,87.581 r180 top
C121 "22uF" CAPC2012X135N 133.635,83.763 r180 top
C122 "22uF" CAPC2012X135N 133.635,85.665 r180 top
C123 "22uF" CAPMP3528X210N 121.108,92.277 r90 top
C124 "22uF" CAPMP3528X210N 158.87,77.033 r90 top
C125 "22uF" CAPC2012X135N 162,77.832 r270 top
C138 "10uF" CAPMP3216X180N 122.252,57.574 r90 top
C142 "100nF" CAPC1005X55N 125.921,61.946 r0 top
C143 "100nF" CAPC1005X55N 127.872,61.946 r180 top
C149 "1uF" CAPC1608X87N 122.317,40.002 r270 top
C154 "100nF" CAPC1005X55N 169.682,58.943 r180 bottom
C167 "10uF" CAPC1608X80N 116.054,47.115 r0 top
CON1 "MRX56904CV" MRX56904CV 206.1,91.1 r90 top
D1 "BAT165" SOD2512X110N 166.046,13.926 r180 top
D2 "DRTR5V0U4S-7" SOT65P210X110-6N 177.16,29.25 r270 top
D3 "PESD3V3L5UY" SOT65P210X110-6N 190.825,9.217 r90 top
D4 "MMSZ5240C" SOD3716X135N 106.14,68 r0 top
D6 "PESD3V3L5UY" SOT65P210X110-6N 190.825,13.293 r90 top
D7 "BAT165" SOD2512X110N 166.046,15.926 r180 top
D11 "SMBJ15A" DIOM5336X265N 169.693,87.822 r90 top
Designator192 "Comment" PCBM_U-BLOX_RCB-F9T-1_A 52,-30.25 r0 top
FL1 "10A/50VDC" FIL_MURATA_BNX02 181.792,87.772 r180 top
FTG5 "Use only in PCB" FIDUCIAL_TOP_C100-200 14.293,5.762 r90 top
FTG6 "Use only in PCB" FIDUCIAL_TOP_S100-200 195.65,89.837 r90 top
FTG7 "Use only in PCB" FIDUCIAL_TOP_S100-200 14.293,5.762 r90 bottom
FTG8 "Use only in PCB" FIDUCIAL_TOP_S100-200 195.65,89.837 r90 bottom
IC1 "INA194AIDBVT" SOT95P280X145-5N 98.499,88.165 r0 top
IC2 "MIC5219-3.3YM5" SOT95P280X145-5N 166.046,7.689 r90 top
IC3 "LT3045EDD#PBF" SON50P300X300X80-11N-R175X248 157.86,33.597 r180 top
IC4 "FIN1028MX" SOIC127P600X175-8N 174.832,47.093 r180 top
IC5 "FIN1028MX" SOIC127P600X175-8N 174.832,40.98 r180 top
IC6 "24AA02E48T-I/OT" SOT95P280X145-5N 172.568,28.481 r180 top
IC7 "FIN1027AMX" SOIC127P600X175-8N 174.832,34.461 r0 top
IC8 "LT3042EMSE#PBF" SOP50P490X110-11N-R168X198 153.801,47.527 r180 top
IC9 "LT3045EDD#PBF" SON50P300X300X80-11N-R175X248 125.31,90.327 r180 top
IC10 "24AA02E48T-I/SN" SOIC127P600X175-8N 174.832,23.009 r0 top
IC11 "LTC6655BHMS8-5#PBF" SOP65P490X110-8N 125.067,42.752 r90 top
IC12 "74HC4066PW" SOP65P640X110-14N 184.699,7.405 r180 top
IC13 "LM75AIMM/NOPB" SOP65P490X109-8N 94.5,27.374 r180 top
IC14 "ADCLK944BCPZ" QFN50P300X300X80-17N-S160 30.236,29.356 r180 top
IC15 "MIC5219-3.3YM5" SOT95P280X145-5N 165.76,33.502 r270 top
IC16 "SCA-4-10+" MINI-CIRCUITS_DZ943 20.4,85.5 r180 top
IC17 "AD9514BCP" QFN50P500X500X100-33N-S325 30.662,72.89 r270 top
IC18 "LMV393M/NOPB" SOIC127P600X175-8N 110.091,86.967 r270 top
IC19 "OPA2197IDGKR" SOP65P490X110-8N 110.5,58.196 r90 top
IC20 "LTC6655BHLS8-5#PBF" 8-CLCC 118.431,42.752 r0 top
IC21 "LT3042EMSE#PBF" SOP50P490X110-11N-R168X198 153.801,57.847 r180 top
IC30 "LT3045EDD#PBF" SON50P300X300X80-11N-R175X248 135.381,90.327 r180 top
IC32 "74HC4066PW" SOP65P640X110-14N 174.832,7.405 r180 top
IC33 "TLC555ID" SOIC127P600X175-8N 174.832,16 r0 top
IC34 "FIN1028MX" SOIC127P600X175-8N 174.832,53.206 r180 top
IC36 "LTM4622AEY#PBF" BGA25C127P5X5_625X625X262 168.597,62.983 r0 top
IC37 "AD5542ABCPZ-REEL7" QFN50P300X300X80-17N-S175 126.896,58.871 r0 top
J1 "SMA" DELOCK_65848 4.54,69.5 r180 top
J2 "IDC" 3M_N2530-6002RB 184.384,38.018 r270 top locked
J3 "SMA" DELOCK_65848 4.5,52.75 r180 top
J4 "SMA" DELOCK_65848 4.58,86.25 r180 top
J5 "Coax_1Female_1Shield" SAMTEC_MMCX-J-P-H-ST-TH1 104.34,74.445 r90 top
J6 "P1" AMPHENOL_10052825-101LF 210.289,9.5 r90 top locked
J7 "MCX" AMPHENOL_919-383J-51A 1.465,32.803 r180 top
J8 "MCX" AMPHENOL_919-383J-51A 1.465,23.357 r180 top
J9 "MCX" AMPHENOL_919-383J-51A 1.465,13.91 r180 top
J10 "Jack" SWITCHCRAFT_L712RA 198.055,74.542 r180 top
J11 "MCX" AMPHENOL_919-383J-51A 1.465,42.25 r180 top
J12 "Coax_1Female_1Shield" SAMTEC_MMCX-J-P-H-ST-TH1 32.451,56.934 r0 top
L1 "120R@100MHz" INDC1608X65N 162.376,33.405 r270 top
L2 "6.8uH" IND_COILCRAFT_XAL4030 160.904,37.852 r270 top
L3 "6.8uH" IND_COILCRAFT_XAL4030 176.37,71.747 r90 top
L4 "6.8uH" IND_COILCRAFT_XAL4030 160.994,51.763 r270 top
L6 "120R@100MHz" INDC1608X65N 157.733,50.595 r90 top
L8 "120R@100MHz" INDC1608X65N 158.579,45.331 r270 top
L9 "470R@100MHz" INDC1608X95N 30.236,34.505 r180 bottom
L10 "6.8uH" IND_COILCRAFT_XAL4030 163.185,73.432 r180 top
L11 "470R@100MHz" INDC1608X95N 101.575,84.255 r180 top
L12 "6.8uH" IND_COILCRAFT_XAL4030 176.235,65.733 r180 top
L13 "470R@100MHz" INDC1608X95N 22.433,55.146 r180 top
L14 "600R@100MHz" INDC1005X55N 105.36,59.395 r90 top
L16 "600R@100MHz" INDC1005X55N 125.245,65.221 r0 top
L17 "6.8uH" IND_COILCRAFT_XAL4030 141.586,90.883 r180 top
L18 "120R@100MHz" INDC1608X65N 140.136,86.839 r270 top
LD1 "Green" LED_KINGBRIGHT_KPH-1608CGCK 147.475,18.75 r0 top
LD2 "Green" LED_KINGBRIGHT_KPH-1608CGCK 147.475,71.582 r0 top
LD3 "Green" LED_KINGBRIGHT_KPH-1608CGCK 105.315,88.258 r0 top
LD4 "Green" LED_KINGBRIGHT_KPH-1608CGCK 147.475,42.627 r0 top
LD5 "Green" LED_DIALIGHT_555-230 -1.551,76.399 r0 top
LD6 "Green" LED_DIALIGHT_555-230 -1.539,62.64 r0 top
LD7 "Red" LED_DIALIGHT_555-200 -1.546,79.399 r0 top
LD8 "Green" LED_KINGBRIGHT_KPH-1608CGCK 147.475,26.804 r0 top
LD9 "Green" LED_DIALIGHT_555-230 -1.539,59.64 r0 top
LD10 "Green" LED_KINGBRIGHT_KPH-1608CGCK 147.475,87.448 r0 top
LD11 "Green" LED_KINGBRIGHT_KPH-1608CGCK 147.475,34.804 r0 top
MSBOX1 "Metal Screening Box 28 Pins" MSBOX_LAIRD_BMI-S-207-F 119.741,56.585 r0 top locked
MSBOX2 "Metal Screening Box 20 Pins" MSBOX_LAIRD_BMI-S-205-F 25.368,71.85 r0 top locked
MSBOX3 "Metal Screening Box 20 Pins" MSBOX_LAIRD_BMI-S-205-F 25.368,28.08 r0 top locked
MSBOXC1 "Top Cover" MSBOX_LAIRD_BMI-S-207-C 119.741,56.585 r0 top locked
MSBOXC2 "Top Cover" MSBOX_LAIRD_BMI-S-205-C 25.368,71.85 r0 top
MSBOXC3 "Top Cover" MSBOX_LAIRD_BMI-S-205-C 25.368,28.08 r0 top
NT1 "Net Tie" "Net Tie" 98.4,85.46 r270 top net-tie
NT2 "Net Tie" "Net Tie" 97.8,85.46 r270 top net-tie
OSC1 "100MHz" OSC_PLETRONICS_OLA5 69.975,65.775 r90 top
OSC2 "100MHz" OSC_WENZEL_501-27514-X4 69.05,64.55 r0 top
R1 "2k2" RESC1005X40N 147.475,33.504 r180 top
R2 "30" RESC1608X55N 106.665,64.641 r180 top
R3 "10k" RESC1608X55N 97.999,90.99 r180 top
R4 "2k2" RESC1005X40N 147.475,17.45 r180 top
R5 "3k9" RESC1005X40N 147.475,70.282 r180 top
R6 "3k9" RESC1005X40N 105.315,86.958 r180 top
R7 "10k" RESC1005X40N 147.475,41.327 r180 top
R8 "120k" RESC1608X55N 166.066,74.505 r90 bottom
R9 "12k" RESC1608X55N 172.147,58.943 r180 bottom
R10 "100" RESC1005X40N 170.039,53.841 r0 top
R11 "39k" RESC1005X40N 169.836,74.632 r180 bottom
R12 "100" RESC1005X40N 179.134,45.766 r90 top
R13 "100" RESC1005X40N 170.039,46.458 r0 top
R14 "100" RESC1005X40N 179.12,39.722 r90 top
R15 "100" RESC1005X40N 170.049,40.348 r0 top
R16 "100" RESC1005X40N 179.12,42.206 r90 top
R17 "1k" RESC1005X40N 170.049,41.644 r0 top
R18 "100" RESC1005X40N 170.049,35.096 r0 top
R19 "10k" RESC1005X40N 98.986,28.886 r0 top
R20 "6k2" RESC1608X55N 172.377,67.297 r180 bottom
R21 "82" RESC1005X40N 172.477,60.243 r0 bottom
R22 "120" RESC1005X40N 31.223,26.135 r0 top
R23 "120" RESC1005X40N 29.283,26.135 r180 top
R24 "0R02" RESC3216X80N 117.352,86.125 r180 top
R25 "120" RESC1005X40N 26.127,28.426 r90 top
R26 "1k2" RESC1608X55N 172.377,65.818 r0 bottom
R27 "120" RESC1005X40N 26.127,30.286 r270 top
R28 "0R02" RESC3216X80N 117.352,83.614 r180 top
R29 "120" RESC1005X40N 29.283,32.565 r180 top
R30 "10k" RESC1005X40N 168.52,73.113 r180 bottom
R31 "0" RESC1005X40N 189.995,55.616 r0 top
R32 "1k6" RESC1608X55N 157.341,36.923 r270 top
R33 "15k" RESC1608X55N 155.833,36.923 r90 top
R34 "0" RESC1005X40N 189.995,54.706 r0 top
R35 "0" RESC1005X40N 189.995,51.456 r0 top
R36 "0" RESC1005X40N 189.995,50.55 r0 top
R37 "0" RESC1005X40N 189.975,47.525 r0 top
R38 "0" RESC1005X40N 189.975,46.6 r0 top
R39 "33k" RESC1608X55N 151.968,33.705 r90 top
R40 "100k" RESC1608X55N 145.666,47.607 r90 top
R41 "5k1" RESC1608X55N 145.655,50.608 r90 top
R42 "1k6" RESC1608X55N 154.61,50.122 r180 top
R43 "51k" RESC1608X55N 151.587,50.122 r180 top
R44 "0" RESC1005X40N 190,34.9 r0 top
R45 "0" RESC1005X40N 190,32.5 r0 top
R46 "0" RESC1005X40N 190,31.625 r0 top
R47 "1k5" RESC1005X40N 124.785,93.523 r270 top
R48 "22k" RESC1005X40N 123.823,93.523 r90 top
R49 "10k" RESC1005X40N 128.713,89.855 r90 top
R50 "200" RESC1005X40N 186.18,11.249 r270 top
R51 "49k9" RESC1608X55N 117.087,91.601 r270 top
R52 "22" RESC1005X40N 180.335,6.97 r90 top
R53 "22" RESC1005X40N 170.031,7.395 r180 top
R54 "22" RESC1005X40N 187.274,11.249 r90 top
R55 "22" RESC1005X40N 170.041,9.366 r180 top
R56 "10k" RESC1005X40N 158.957,5.061 r180 top
R57 "22" RESC1005X40N 179.4,6.97 r90 top
R58 "1k6" RESC1005X40N 178.003,11.723 r270 top value=10k
R59 "0" RESC1005X40N 190,43.625 r0 top
R60 "0" RESC1005X40N 190,42.75 r0 top
R61 "0" RESC1005X40N 189.995,39.75 r0 top
R62 "0" RESC1005X40N 190,38.875 r0 top
R63 "0" RESC1005X40N 190,35.775 r0 top
R64 "100" RESC1005X40N 128.456,51.976 r270 top
R65 "2k2" RESC1005X40N 147.475,25.504 r180 top
R66 "0" RESC1005X40N 190,28.1 r0 top
R67 "0" RESC1005X40N 190,27.2 r0 top
R68 "120" RESC1005X40N 26.127,26.556 r270 top
R69 "120" RESC1005X40N 26.127,32.156 r90 top
R70 "120" RESC1005X40N 31.223,32.565 r0 top
R71 "0R05" RESC2012X60N 98.1,84.256 r180 top
R72 "Undefined" RESC1608X55N 143.568,86.84 r90 top
R73 "200" RESC1005X40N 35.214,71.471 r90 top
R74 "200" RESC1005X40N 35.214,73.274 r90 top
R75 "49R9" RESC1005X40N 31.677,77.556 r0 top
R76 "Undefined" RESC1608X55N 28.116,66.278 r270 top
R77 "4k12" RESC1005X40N 34.611,75.996 r270 top
R78 "Undefined" RESC1608X55N 29.668,66.278 r270 top
R79 "200" RESC1005X40N 31.487,67.278 r180 top
R80 "200" RESC1005X40N 33.367,67.278 r180 top
R81 "10k" RESC1608X55N 112.341,94.188 r180 top
R82 "10k" RESC1608X55N 112.341,92.688 r180 top
R83 "Undefined" RESC1608X55N 15.472,58.147 r180 top
R84 "Undefined" RESC1608X55N 22.442,58.147 r180 top
R85 "0" RESC1608X55N 18.957,58.147 r180 top
R86 "Undefined" RESC1608X55N 15.472,59.866 r180 top
R87 "Undefined" RESC1608X55N 22.442,59.866 r180 top
R88 "0" RESC1608X55N 18.957,59.866 r180 top
R89 "Undefined" RESC1608X55N 15.472,61.586 r180 top
R90 "Undefined" RESC1608X55N 22.442,61.586 r180 top
R91 "Undefined" RESC1608X55N 18.957,61.586 r180 top
R92 "220" RESC1608X55N 4.576,62.595 r0 top
R93 "0" RESC1608X55N 15.472,63.305 r180 top
R94 "Undefined" RESC1608X55N 22.442,63.305 r180 top
R95 "Undefined" RESC1608X55N 18.957,63.305 r180 top
R96 "0" RESC1608X55N 15.472,65.025 r180 top
R97 "Undefined" RESC1608X55N 22.442,65.025 r180 top
R98 "Undefined" RESC1608X55N 18.957,65.025 r180 top
R99 "10k" RESC1608X55N 109.05,92.688 r180 top
R100 "3k3" RESC1608X55N 153.801,60.46 r0 top
R101 "0" RESC1608X55N 15.472,66.744 r180 top
R102 "Undefined" RESC1608X55N 22.442,66.744 r180 top
R103 "Undefined" RESC1608X55N 18.957,66.744 r180 top
R104 "Undefined" RESC1608X55N 15.472,68.464 r180 top
R105 "0" RESC1608X55N 22.442,68.464 r180 top
R106 "Undefined" RESC1608X55N 18.957,68.464 r180 top
R107 "0" RESC1608X55N 15.472,70.183 r180 top
R108 "Undefined" RESC1608X55N 22.442,70.183 r180 top
R109 "Undefined" RESC1608X55N 18.957,70.183 r180 top
R110 "Undefined" RESC1608X55N 15.472,71.903 r180 top
R111 "0" RESC1608X55N 22.442,71.903 r180 top
R112 "Undefined" RESC1608X55N 18.957,71.903 r180 top
R113 "220k" RESC1005X40N 110.726,91.334 r0 top
R114 "0" RESC1608X55N 15.472,73.622 r180 top
R115 "Undefined" RESC1608X55N 22.442,73.622 r180 top
R116 "49k9" RESC1608X55N 118.608,91.601 r270 top
R117 "27k" RESC1005X40N 146.032,58.863 r270 top
R118 "220" RESC1608X55N 4.576,59.64 r0 top
R119 "220" RESC1608X55N 4.699,76.399 r0 top
R120 "Undefined" RESC1608X55N 18.957,73.622 r180 top
R121 "220" RESC1608X55N 4.699,79.399 r180 top
R122 "10k" RESC1005X40N 102,29.359 r0 top
R123 "10k" RESC1005X40N 154.294,5.061 r0 top
R124 "10k" RESC1005X40N 98.986,25.854 r0 top
R125 "10k" RESC1005X40N 98.986,26.903 r0 top
R126 "0" RESC1005X40N 169.169,20.873 r90 top
R127 "0" RESC1005X40N 98.986,27.895 r0 top
R128 "0" RESC1005X40N 169.169,23.411 r90 top
R129 "0" RESC1608X55N 9.414,94.075 r180 top
R130 "0" RESC1608X55N 9.675,5.95 r180 top
R131 "10k" RESC1005X40N 147.475,86.148 r180 top
R132 "Undefined" RESC1608X55N 15.472,75.342 r180 top
R133 "0" RESC1608X55N 22.442,75.342 r180 top
R134 "Undefined" RESC1608X55N 18.957,75.342 r180 top
R135 "47k" RESC1005X40N 151.331,60.46 r0 top
R136 "0" RESC1005X40N 122.243,60.96 r180 top
R137 "10k" RESC1005X40N 177.022,11.723 r270 top
R138 "2k7" RESC1608X55N 172.881,11.723 r270 top
R139 "5k6" RESC1005X40N 174.081,11.723 r270 top value=10k
R140 "10k" RESC1005X40N 175.061,11.723 r270 top value=22
R141 "10k" RESC1005X40N 176.042,11.723 r270 top
R142 "27k" RESC1005X40N 146.032,60.701 r270 top
R143 "1k6" RESC1005X40N 178.984,11.723 r270 top value=10k
R144 "0" RESC1005X40N 157.043,5.061 r180 top
R145 "0" RESC1005X40N 169.906,14.095 r180 top
R146 "10k" RESC1005X40N 169.906,17.905 r0 top
R147 "10k" RESC1005X40N 169.906,15.365 r0 top
R148 "30" RESC1608X55N 106.85,54.449 r180 top
R149 "0" RESC2012X60N 161.862,7.767 r270 top
R150 "0" RESC1005X40N 184.365,10.779 r0 top
R151 "0" RESC1005X40N 182.272,10.779 r180 top
R152 "10k" RESC1005X40N 184.365,11.874 r0 top
R153 "10k" RESC1005X40N 182.272,11.874 r180 top
R154 "4M7" RESC2113X55N 47.909,3.85 r0 bottom
R155 "4M7" RESC2113X55N 51.5,3.85 r0 bottom
R156 "4M7" RESC2113X55N 42.425,3.85 r180 bottom
R157 "4M7" RESC2113X55N 38.825,3.85 r180 bottom
R158 "100" RESC1005X40N 179.132,51.924 r90 top
R159 "10k" RESC1608X55N 110.842,52.646 r270 top
R160 "10k" RESC1608X55N 112.342,52.646 r270 top
R161 "100" RESC1005X40N 170.039,52.571 r0 top
R162 "100" RESC1005X40N 179.132,54.513 r90 top
R163 "100" RESC1005X40N 130.015,51.976 r270 top
R164 "10" RESC1005X40N 128.558,65.221 r180 top
R165 "100" RESC1005X40N 131.575,51.981 r270 top
R166 "100" RESC1005X40N 130.015,57.726 r90 top
R167 "Undefined" RESC1608X55N 142.063,86.839 r90 top
R168 "Undefined" RESC1608X55N 104.34,65.441 r90 top
R169 "30" RESC1608X55N 104.34,70.641 r90 top
R170 "100" RESC1005X40N 126.897,51.981 r270 top
R179 "0" RESC1005X40N 117.554,48.455 r180 top
RN5 "10k 5K 5K 10K" SOIC127P600X175-8N 116.167,58.199 r270 top
ST1 "SCHROFF_PANEL_3U_4HP" SCHROFF_PANEL_3HP_4U 3.556,5.512 r0 top locked
T1 "BSH103" SOT95P230X110-3N 154.293,11.6 r270 top
T2 "BSH103" SOT95P230X110-3N 102,26.962 r0 top
T3 "BSH103" SOT95P230X110-3N 157.91,11.6 r270 top
T4 "BSH103" SOT95P230X110-3N 157.91,7.614 r270 top
T13 "BSH103" SOT95P230X110-3N 154.293,7.595 r270 top
TP1 "Test Point" TPS127 147.45,84.274 r0 top
TP2 "Test Point" TPS127 147.475,31.63 r90 top
TP3 "Test Point" TPS127 147.475,8.189 r90 top
TP4 "Test Point" TPS127 147.372,93.119 r90 top
TP5 "Test Point" TPS127 167.14,20.927 r90 top
TP6 "Test Point" TPS127 167.14,23.374 r270 top
TP7 "Test Point" TPS127 167.14,18.48 r270 top
TP8 "Test Point" TPS127 147.475,68.408 r0 top
TP9 "Test Point" TPS127 105.315,85.084 r0 top
TP10 "Test Point" TPS127 147.475,39.453 r90 top
TP11 "Test Point" TPS127 147.475,15.576 r0 top
TP12 "Test Point" TPS127 147.475,23.63 r90 top
TR1 "1:1" XFMR_MINI-CIRCUITS_AT1521 16.84,15.18 r270 top
TR2 "1:1" XFMR_MINI-CIRCUITS_AT1521 16.84,24.627 r270 top
TR3 "1:1" XFMR_MINI-CIRCUITS_AT1521 16.84,34.073 r270 top
TR4 "1:1" XFMR_MINI-CIRCUITS_AT1521 16.84,43.52 r270 top
TR5 "1:1" XFMR_MINI-CIRCUITS_AT1521 32.423,61.828 r0 top
U1 "LTM8083IY#PBF" FP-BGA-49-05-08-1518-MFG 169.766,76.632 r270 top
WASHER4 "Custom 3D printed" Keystone_7687 -3.56,69.5 r0 top
WASHER6 "Custom 3D printed" Keystone_7687 -3.52,86.25 r0 top
WASHER7 "Custom 3D printed" Keystone_7687 -3.6,52.75 r0 top

## Footprints (in the part's own frame and the unit in brackets; to place one, negate y for a bottom-side part, rotate by r counter-clockwise, add the part's x,y. Pads: shape width x height; smd on the part's side, far side on the other; paste and mask are expansions set on the pad)
3M_N2530-6002RB [mm] "30 Contacts - Straight .100\" x .100\" Low Profile Four-Wall Header"
  round 1.6 hole 1: 1(-17.78,-1.27) 2(-17.78,1.27) 3(-15.24,-1.27) 4(-15.24,1.27) 5(-12.7,-1.27) 6(-12.7,1.27) 7(-10.16,-1.27) 8(-10.16,1.27) 9(-7.62,-1.27) 10(-7.62,1.27) 11(-5.08,-1.27) 12(-5.08,1.27) 13(-2.54,-1.27) 14(-2.54,1.27) 15(0,-1.27) 16(0,1.27) 17(2.54,-1.27) 18(2.54,1.27) 19(5.08,-1.27) 20(5.08,1.27) 21(7.62,-1.27) 22(7.62,1.27) 23(10.16,-1.27) 24(10.16,1.27) 25(12.7,-1.27) 26(12.7,1.27) 27(15.24,-1.27) 28(15.24,1.27) 29(17.78,-1.27) 30(17.78,1.27)
  silkscreen extent -22.71,-4.85 22.71,4.52, body extent -22.71,-4.11 22.71,4.52, height 9.91
8-CLCC [mm]
  rect 0.7x1.85 smd: 1(-1.521,-2.197) 2(-0.251,-2.197) 3(1.019,-2.197) 5(1.019,2.203) 6(-0.251,2.203) 7(-1.521,2.203)
  rect 1.85x0.7 smd: 4(1.949,0.003)
  rect 2.5x0.7 smd: 8(-2.001,0.003)
  silkscreen extent -2.85,-3.8 2.35,2.6, body extent -2.88,-2.63 2.38,2.63, height 1.55
AMPHENOL_919-383J-51A [mm] "50 Ohm, RF Connector, MCX Right Angle PCB Receptacle Jack"
  round 1.9 hole 1.2: 1(0,0)
  round 2.4 hole 1.7: 2(-2.54,2.54) 2(-2.54,-2.54) 2(2.54,2.54) 2(2.54,-2.54)
  silkscreen extent -3,-3 6.5,3, body extent -3,-3 6.5,3, height 6
AMPHENOL_10052825-101LF [mm] "72 Contacts, 2mm Pitch, 6 Columns, 4 Pairs per Column, 4 Walls, Right Angle Header"
  round 1.1 hole 0.5: A1(-5,-7.65) A2(-3,-7.75) A3(-1,-7.65) A4(1,-7.75) A5(3,-7.65) A6(5,-7.75) B1(-5,-6.25) B2(-3,-6.35) B3(-1,-6.25) B4(1,-6.35) B5(3,-6.25) B6(5,-6.35) C1(-5,-4.85) C2(-3,-4.95) C3(-1,-4.85) C4(1,-4.95) C5(3,-4.85) C6(5,-4.95) D1(-5,-3.45) D2(-3,-3.55) D3(-1,-3.45) D4(1,-3.55) D5(3,-3.45) D6(5,-3.55) E1(-5,-2.05) E2(-3,-2.15) E3(-1,-2.05) E4(1,-2.15) E5(3,-2.05) E6(5,-2.15) F1(-5,-0.65) F2(-3,-0.75) F3(-1,-0.65) F4(1,-0.75) F5(3,-0.65) F6(5,-0.75) G1(-5,0.75) G2(-3,0.65) G3(-1,0.75) G4(1,0.65) G5(3,0.75) G6(5,0.65) H1(-5,2.15) H2(-3,2.05) H3(-1,2.15) H4(1,2.05) H5(3,2.15) H6(5,2.05) I1(-5,3.55) I2(-3,3.45) I3(-1,3.55) I4(1,3.45) I5(3,3.55) I6(5,3.45) J1(-5,4.95) J2(-3,4.85) J3(-1,4.95) J4(1,4.85) J5(3,4.95) J6(5,4.85) K1(-5,6.35) K2(-3,6.25) K3(-1,6.35) K4(1,6.25) K5(3,6.35) K6(5,6.25) L1(-5,7.75) L2(-3,7.65) L3(-1,7.75) L4(1,7.65) L5(3,7.75) L6(5,7.65)
  silkscreen extent -6.95,-21.95 6.95,11.85, body extent -6.95,-21.95 6.95,11.85, height 15.25
BGA25C127P5X5_625X625X262 [mm] "BGA, 1.27mm Pitch, Square; 25 Pin, 5 Columns X 5 Rows, 6.25mm X 6.25mm X 2.62mm H"
  round 0.6 smd: A1(-2.54,2.54) A2(-1.27,2.54) A3(0,2.54) A4(1.27,2.54) A5(2.54,2.54) B1(-2.54,1.27) B2(-1.27,1.27) B3(0,1.27) B4(1.27,1.27) B5(2.54,1.27) C1(-2.54,0) C2(-1.27,0) C3(0,0) C4(1.27,0) C5(2.54,0) D1(-2.54,-1.27) D2(-1.27,-1.27) D3(0,-1.27) D4(1.27,-1.27) D5(2.54,-1.27) E1(-2.54,-2.54) E2(-1.27,-2.54) E3(0,-2.54) E4(1.27,-2.54) E5(2.54,-2.54)
  silkscreen extent -3.87,-3.15 3.15,3.15, body extent -3.12,-3.12 3.13,3.13, height 2.62
CAPAE830X620N [mm] "Capacitor, Aluminium Electrolytric, 8.3mm L X 8.3mm W X 6.2mm H, IPC Medium Density"
  rect 4.15x1.6 smd: 1(-3.15,0) 2(3.15,0)
  silkscreen extent -4.9,-4.15 4.15,4.15, body extent -4.75,-4.25 4.75,4.25, height 6.2
CAPC1005X55N [mm] "Capacitor, Non-Polarized, Chip; 1.00mm L X 0.50mm W X 0.70mm H, IPC Medium Density"
  rect 0.62x0.62 smd: 1(-0.45,0) 2(0.45,0)
  body extent -0.52,-0.27 0.53,0.28, height 0.55
CAPC1608X80N [mm] "Chip Capacitor, Body 1.6x0.8mm IPC Medium Density"
  rect 1x1 smd: 1(-0.75,0) 2(0.75,0)
  body extent -0.87,-0.47 0.88,0.48, height 0.8
CAPC1608X87N [mm] "Chip Capacitor, Body 1.6x0.8mm IPC Medium Density"
  rect 0.95x1 smd: 1(-0.8,0) 2(0.8,0)
  body extent -0.87,-0.47 0.88,0.48, height 0.87
CAPC1608X90N [mm] "Chip Capacitor, Body 1.6x0.8mm IPC Medium Density"
  rect 0.95x0.95 smd: 1(-0.75,0) 2(0.75,0)
  body extent -0.85,-0.45 0.85,0.45, height 0.9
CAPC2012X135N [mm] "Chip Capacitor, Body 2.0x1.25mm, IPC Medium Density"
  rect 1.05x1.4 smd: 1(-0.9,0) 2(0.9,0)
  silkscreen extent 0,-0.58 0,0.58, body extent -1.05,-0.67 1.05,0.68, height 1.25
CAPMP3216X180N [mm] "Capacitor, Polarized, Molded  Body 3.2x1.6mm, IPC Medium Density"
  rect 1.8x1.25 smd: 1(-1.3,0) 2(1.3,0)
  silkscreen extent -2.4,-0.7 0,1.25, body extent -1.7,-0.9 1.7,0.9, height 1.6
CAPMP3528X210N [mm] "Capacitor, Polarized, Molded  Body 3.5x2.8mm, IPC Medium Density"
  rect 1.8x2.25 smd: 1(-1.45,0) 2(1.45,0)
  silkscreen extent -2.52,-1.5 1.85,1.72, body extent -1.85,-1.5 1.85,1.5, height 2.1
DELOCK_65848 [mm] "50 Ohm Through Hole SMA Right Angle PCB Jack"
  round 2.1 hole 1.4: 1(0,0)
  round 2.2 hole 1.5: 2(-2.54,2.54) 2(-2.54,-2.54) 2(2.54,2.54) 2(2.54,-2.54)
  silkscreen extent -3,-5.1 19.1,5.1, body extent -3.04,-3.17 18.96,3.09, height 9.15
DIOM5336X265N [mm] "DO-214-AA/SMB Diode, Molded Body; 5.34mm L X 3.625mm W X 2.65mm H, IPC Medium Density"
  rect 2.3x2.15 smd: 1(-2.15,0) 2(2.15,0)
  silkscreen extent -3.92,-1.8 2.65,1.8, body extent -2.7,-1.95 2.7,1.95, height 2.4
FIDUCIAL_TOP_C100-200 [mm] "Round Fiducial Target, Top Layer, 1.0mm, Top Solder 2.0mm, Keepout =2.0mm"
  round 1 smd paste-0.51 mask+0.5: FTG2(0,0)
  Top keep-out circle w0.1: c0,0 r1
FIDUCIAL_TOP_S100-200 [mm] "Square Fiducial Target, Top Layer, 1.0mm, Top Solder 2.0mm, Keepout =2.0mm"
  rect 1x1 smd rot 45 paste-0.51 mask+0.5: 1(0,0)
  Top keep-out region: 1.414,0 0,-1.414 -1.414,0 0,1.414
FIL_MURATA_BNX02 [mm] "Block Type EMIFIL LC Combined Type, BNX02* Series"
  rect 3.8x2.5 smd: 1(-6.85,2.1) 2(6.85,2.1) 3(-6.85,-2.2) 4(6.85,-2.2)
  rect 7.9x2.3 smd: 4(1,-5.1)
  rect 3.4x2.3 smd: 4(3.25,5.1)
  silkscreen extent -5.95,-4.45 7.77,5.05, body extent -6.05,-4.55 6.05,4.55, height 3.1
FP-BGA-49-05-08-1518-MFG [mm]
  round 0.4 smd paste+0 mask+0: A1(-2.4,2.4) A2(-1.6,2.4) A3(-0.8,2.4) A4(0,2.4) A5(0.8,2.4) A6(1.6,2.4) A7(2.4,2.4) B1(-2.4,1.6) B2(-1.6,1.6) B3(-0.8,1.6) B4(0,1.6) B5(0.8,1.6) B6(1.6,1.6) B7(2.4,1.6) C1(-2.4,0.8) C2(-1.6,0.8) C3(-0.8,0.8) C4(0,0.8) C5(0.8,0.8) C6(1.6,0.8) C7(2.4,0.8) D1(-2.4,0) D2(-1.6,0) D3(-0.8,0) D4(0,0) D5(0.8,0) D6(1.6,0) D7(2.4,0) E1(-2.4,-0.8) E2(-1.6,-0.8) E3(-0.8,-0.8) E4(0,-0.8) E5(0.8,-0.8) E6(1.6,-0.8) E7(2.4,-0.8) F1(-2.4,-1.6) F2(-1.6,-1.6) F3(-0.8,-1.6) F4(0,-1.6) F5(0.8,-1.6) F6(1.6,-1.6) F7(2.4,-1.6) G1(-2.4,-2.4) G2(-1.6,-2.4) G3(-0.8,-2.4) G4(0,-2.4) G5(0.8,-2.4) G6(1.6,-2.4) G7(2.4,-2.4)
  silkscreen extent -3.67,-3.2 3.2,3.2, body extent -3.7,-3.7 3.7,3.7, height 0.25
IND_COILCRAFT_XAL4030 [mm] "SMD Inductor, Width 4.3mm X Lenght 4.3mm X Height 3.1mm Body, XAL4030 Series"
  rect 0.98x3.4 smd: 1(-1.185,0) 2(1.185,0)
  silkscreen extent -2.15,-2.15 2.15,2.15, body extent -2.15,-2.15 2.15,2.15, height 3.1
INDC1005X55N [mm] "Chip Inductor, 2-Leads, EIA 0402, Metric 1005, Body 1x0.5mm, 0402IPC Medium Density"
  rect 0.6x0.62 smd: 1(-0.46,0) 2(0.46,0)
  body extent -0.52,-0.27 0.53,0.28, height 0.55
INDC1608X65N [mm] "Chip Inductor, 2-Leads, EIA 0603, Metric 1608, Body 1.6x0.8mm, IPC Medium Density"
  rect 1x1 smd: 1(-0.75,0) 2(0.75,0)
  body extent -0.87,-0.47 0.88,0.48, height 0.65
INDC1608X95N [mm] "Chip Inductor, 2-Leads, EIA 0603, Metric 1608, Body 1.6x0.8mm, IPC Medium Density"
  rect 0.95x1 smd: 1(-0.8,0) 2(0.8,0)
  body extent -0.87,-0.47 0.88,0.48, height 0.95
Keystone_7687 [mm] "Polyphenylene Sulfide PPS Shoulder Washer"
  silkscreen extent -0.8,-5.6 0.8,5.6
LED_DIALIGHT_555-200 [mm] "Single 2mm Red LED, Body 5.08x2.54mm, Pin spacing 2.54mm"
  round 1.7 hole 1: 1(2.54,0) 2(0,0)
  silkscreen extent -2.16,-1.27 4.06,1.27, body extent -2.16,-1.27 4.06,1.27, height 6.35
LED_DIALIGHT_555-230 [mm] "Single 2mm Green LED, Body 5.08x2.54mm, Pin spacing 2.54mm"
  round 1.7 hole 1: 1(2.54,0) 2(0,0)
  silkscreen extent -2.16,-1.27 4.06,1.27, body extent -2.16,-1.27 4.06,1.27, height 6.35
LED_KINGBRIGHT_KPH-1608CGCK [mm] "SMT Green LED, Case 0603, Body L 1.6 x W 0.8mm H 0.65mm"
  rect 0.8x0.8 smd: 1(-0.825,0) 2(0.825,0)
  silkscreen extent -1.82,-0.4 0.08,0.4, body extent -0.8,-0.4 0.8,0.4, height 0.65
MINI-CIRCUITS_DZ943 [mm] "MINI-CIRCUITS TDZ943 Case, 10 pin,  7.62mm W X 6.35mm L"
  rect 2.16x0.76 smd: 1(-2.73,2.54) 2(-2.73,1.27) 3(-2.73,0) 4(-2.73,-1.27) 5(-2.73,-2.54) 6(2.73,-2.54) 7(2.73,-1.27) 8(2.73,0) 9(2.73,1.27) 10(2.73,2.54)
  silkscreen extent -4.43,-3.81 3.18,3.81, body extent -3.38,-3.81 3.38,3.81, height 4.83
MRX56904CV [mm]
  oct 2.5x3 hole 1.8: 1(0,0) 2(-4.2,0) 3(0,5.5) 4(-4.2,5.5)
  round 4 hole 3.2: 9(-2.1,-7.3)
  silkscreen extent -6.88,-13.94 3.12,5.99, body extent -6.88,-14.02 3.12,5.92, height 11.4
MSBOX_LAIRD_BMI-S-205-C [mm] "Cover for Frame of Standard Surface Mount Shield (Two Piece), External Dimensions 25.86 x 38.56mm"
  body extent -12.93,-19.28 12.93,19.28, height 6.13
MSBOX_LAIRD_BMI-S-205-F [mm] "Frame of Standard Surface Mount Shield (Two Piece), External Dimensions 25.4 x 38.1mm"
  rect 1x3.1 smd: 1(-12.6,17.9) 7(-12.6,-17.9) 11(12.6,-17.9) 17(12.6,17.9)
  rect 1.75x1 smd: 1(-11.225,18.95) 7(-11.225,-18.953) 11(11.225,-18.95) 17(11.225,18.95)
  rect 1x3.3 smd: 2(-12.6,12) 3(-12.6,6) 4(-12.6,0) 5(-12.6,-6) 6(-12.6,-12) 12(12.6,-12) 13(12.6,-6) 14(12.6,0) 15(12.6,6) 16(12.6,12)
  rect 3.3x1 smd: 8(-6,-18.957) 9(0,-18.95) 10(6,-18.95) 18(6,18.95) 19(0,18.95) 20(-6,18.95)
  silkscreen extent -13.45,-19.8 13.45,19.8, body extent -12.75,-19.1 12.75,19.1, height 6
MSBOX_LAIRD_BMI-S-207-C [mm] "Cover for Frame of Standard Surface Mount Shield (Two Piece), External Dimensions 44.83 x 44.83mm"
  body extent -22.41,-22.41 22.42,22.42, height 9.88